# EAGLE board ACU rev2 CCU rev7 (EAGLE 9.6.2), part 1 of 2
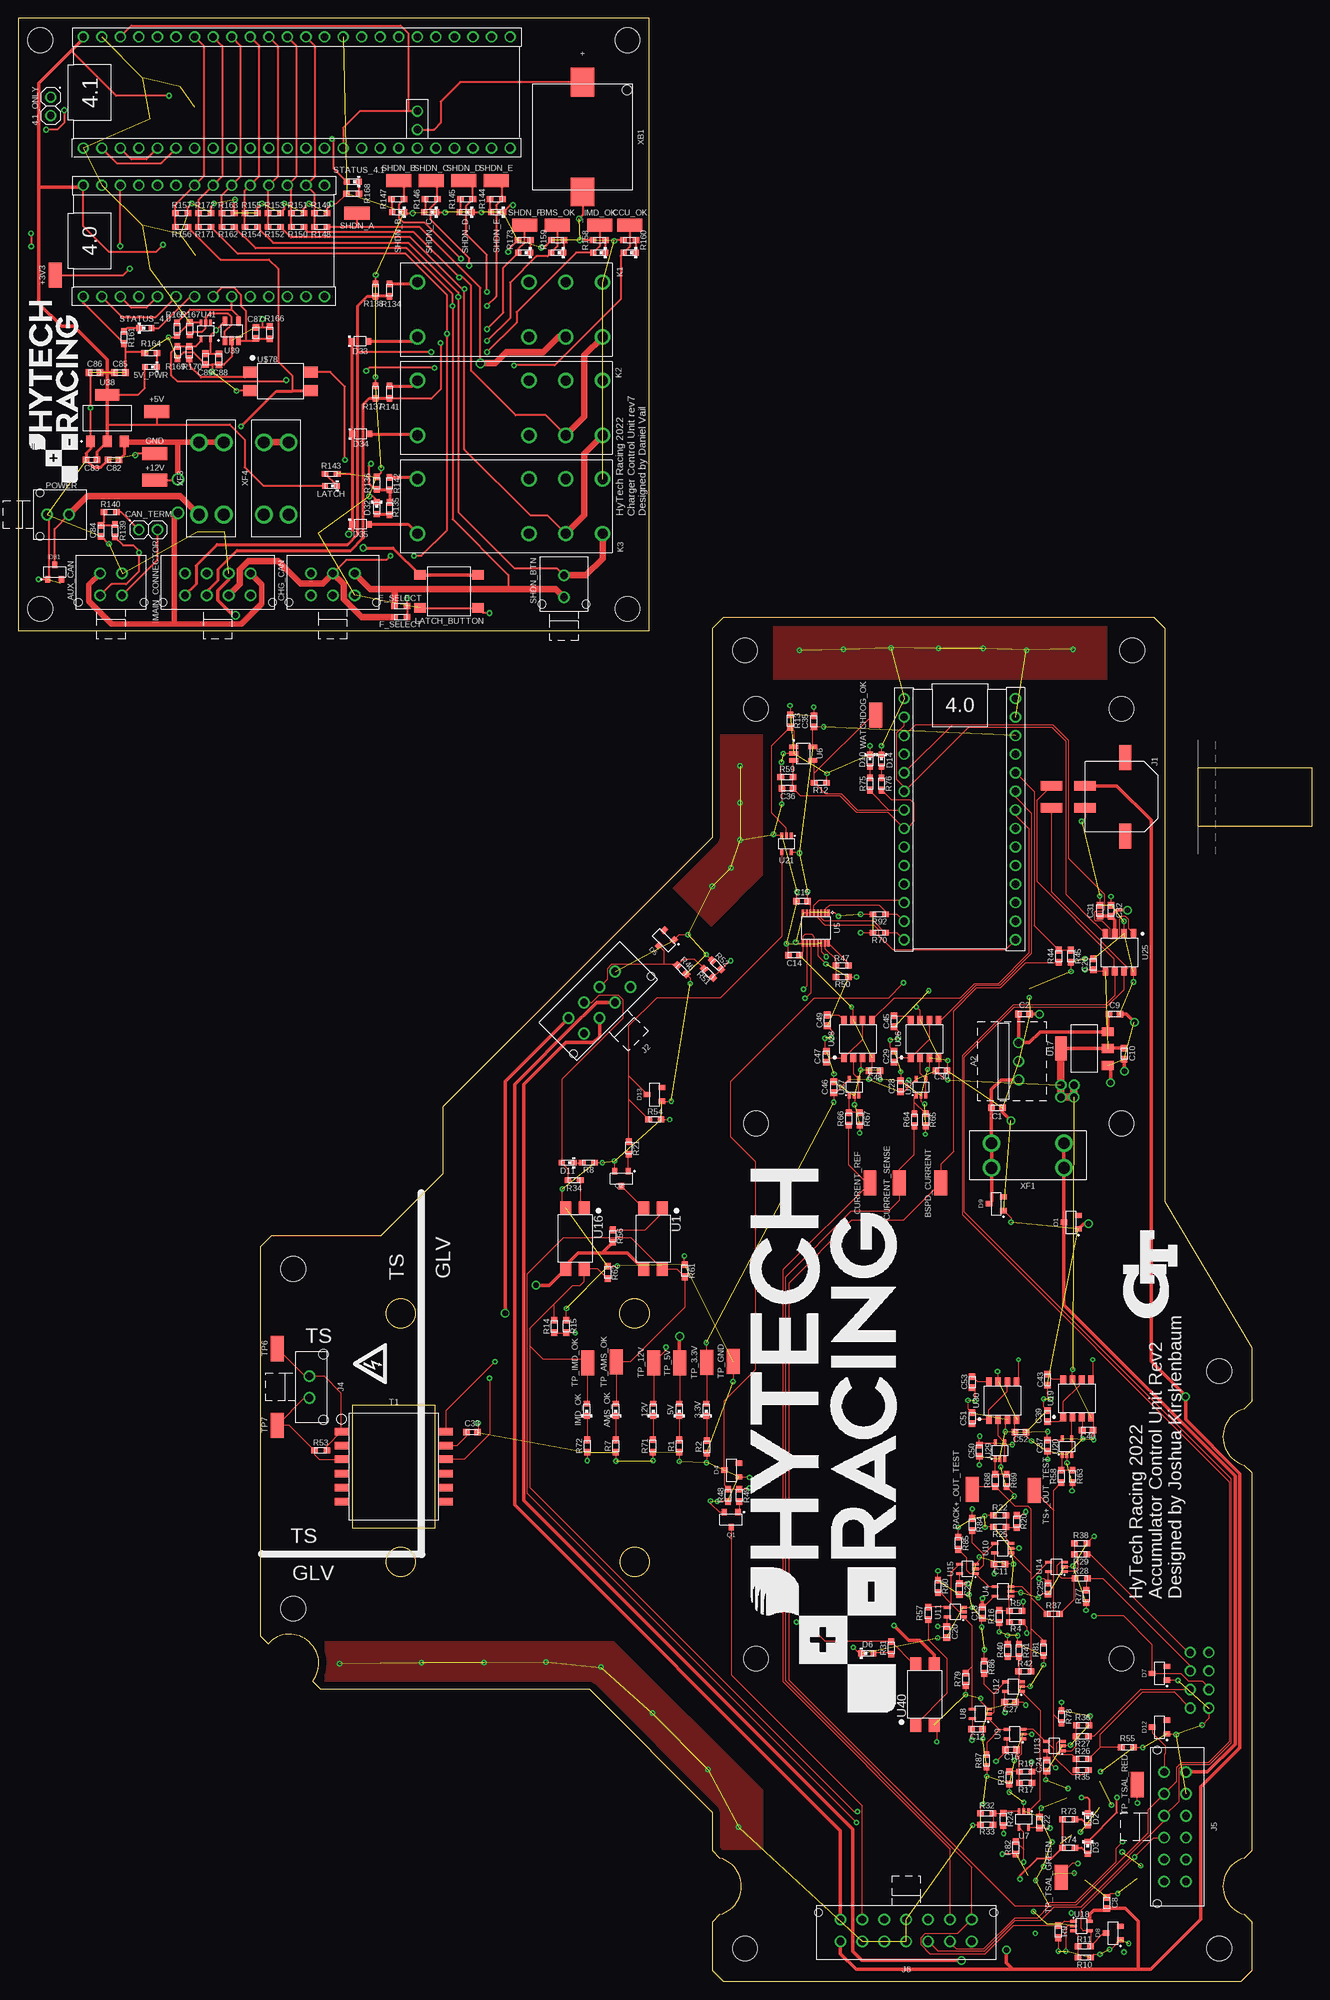
[diagram p0: board, top side]
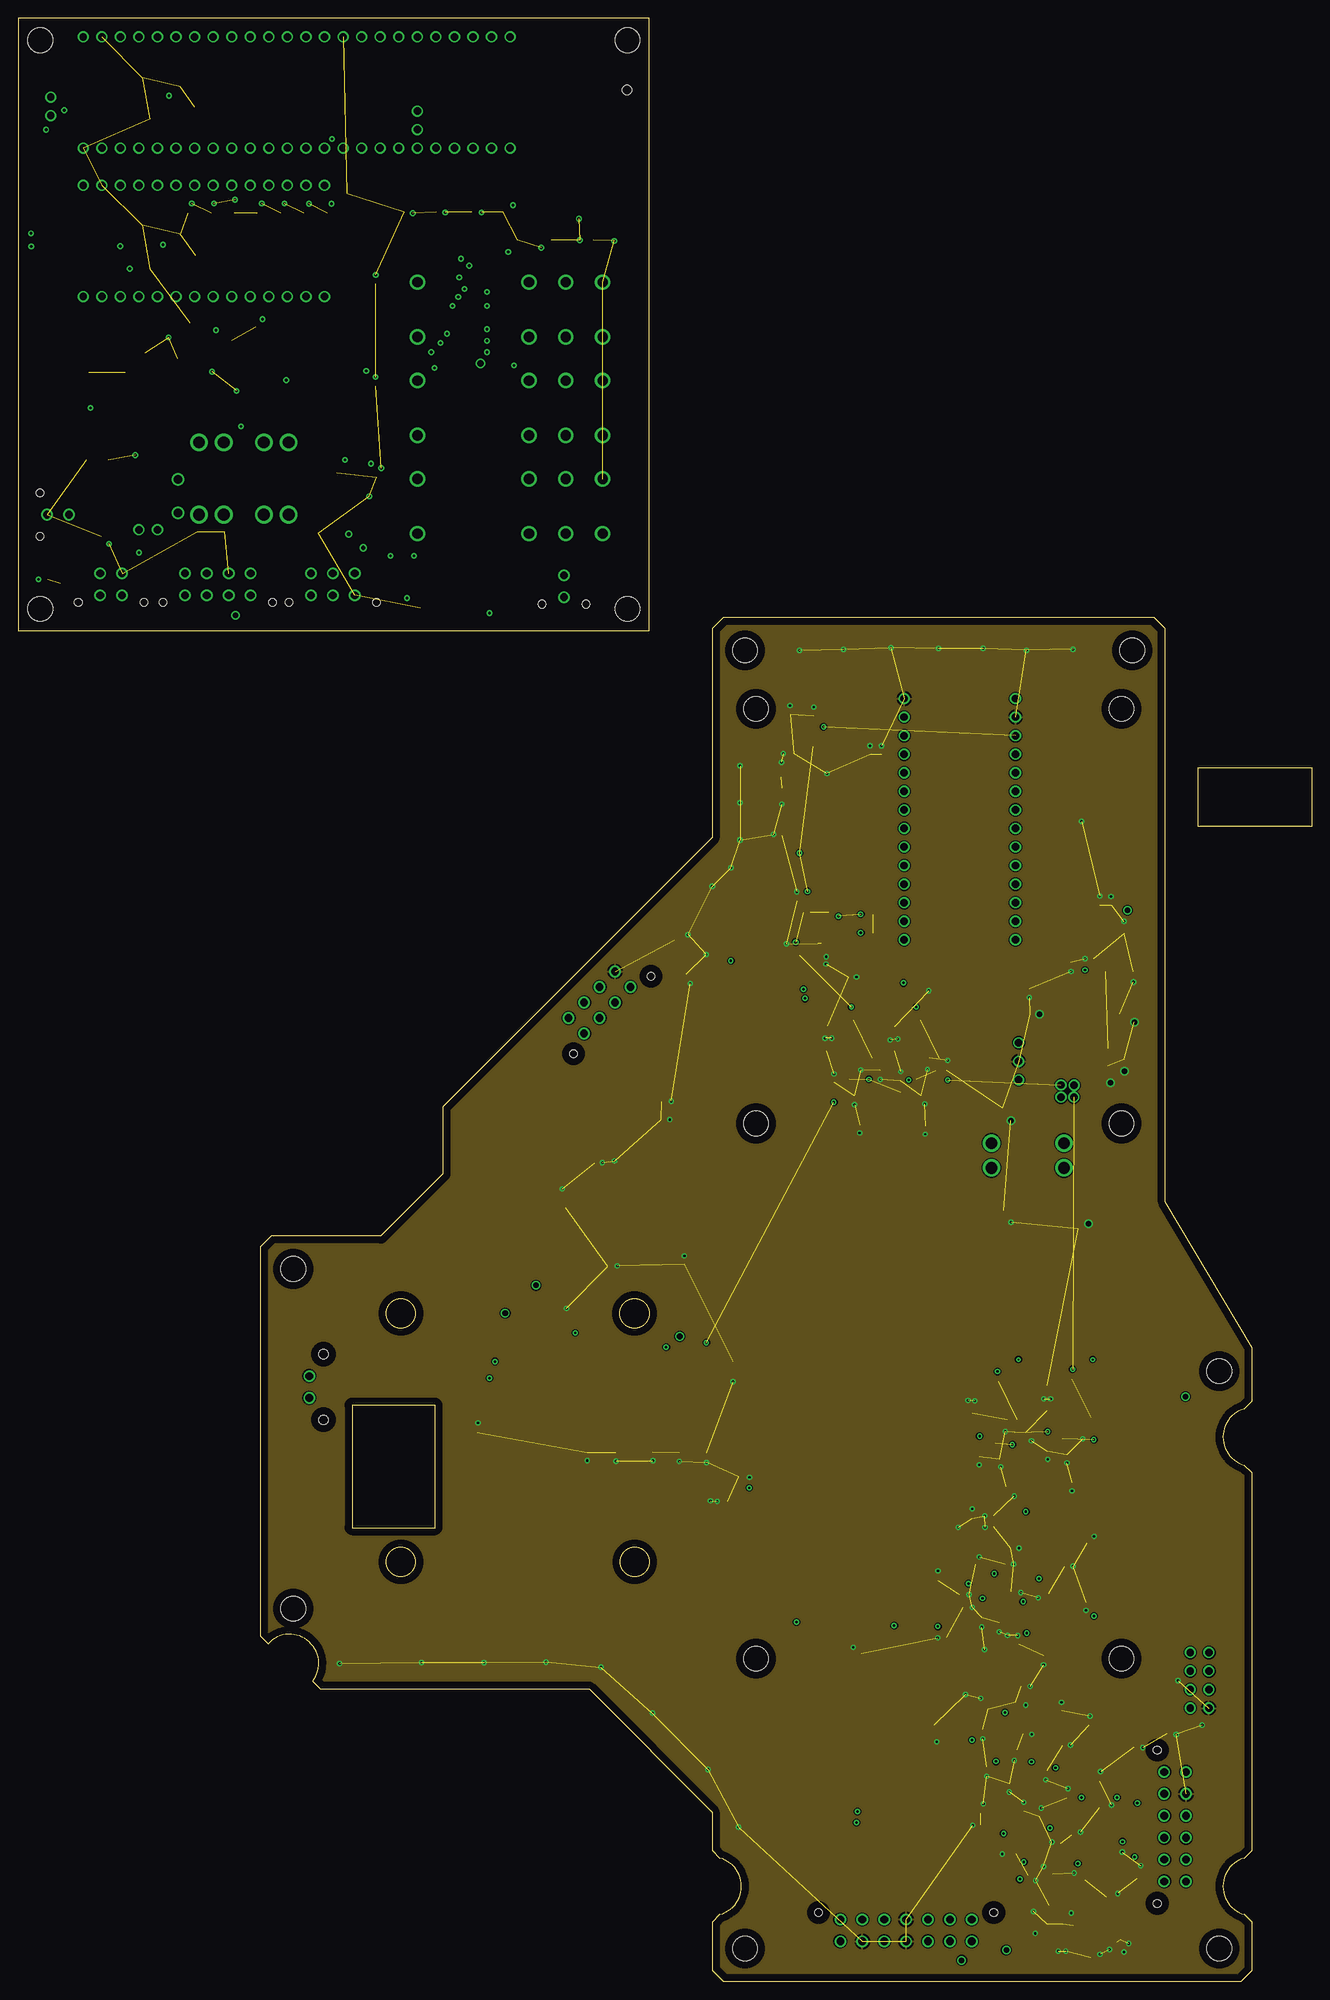
[diagram p1: board, inner layer Route2]
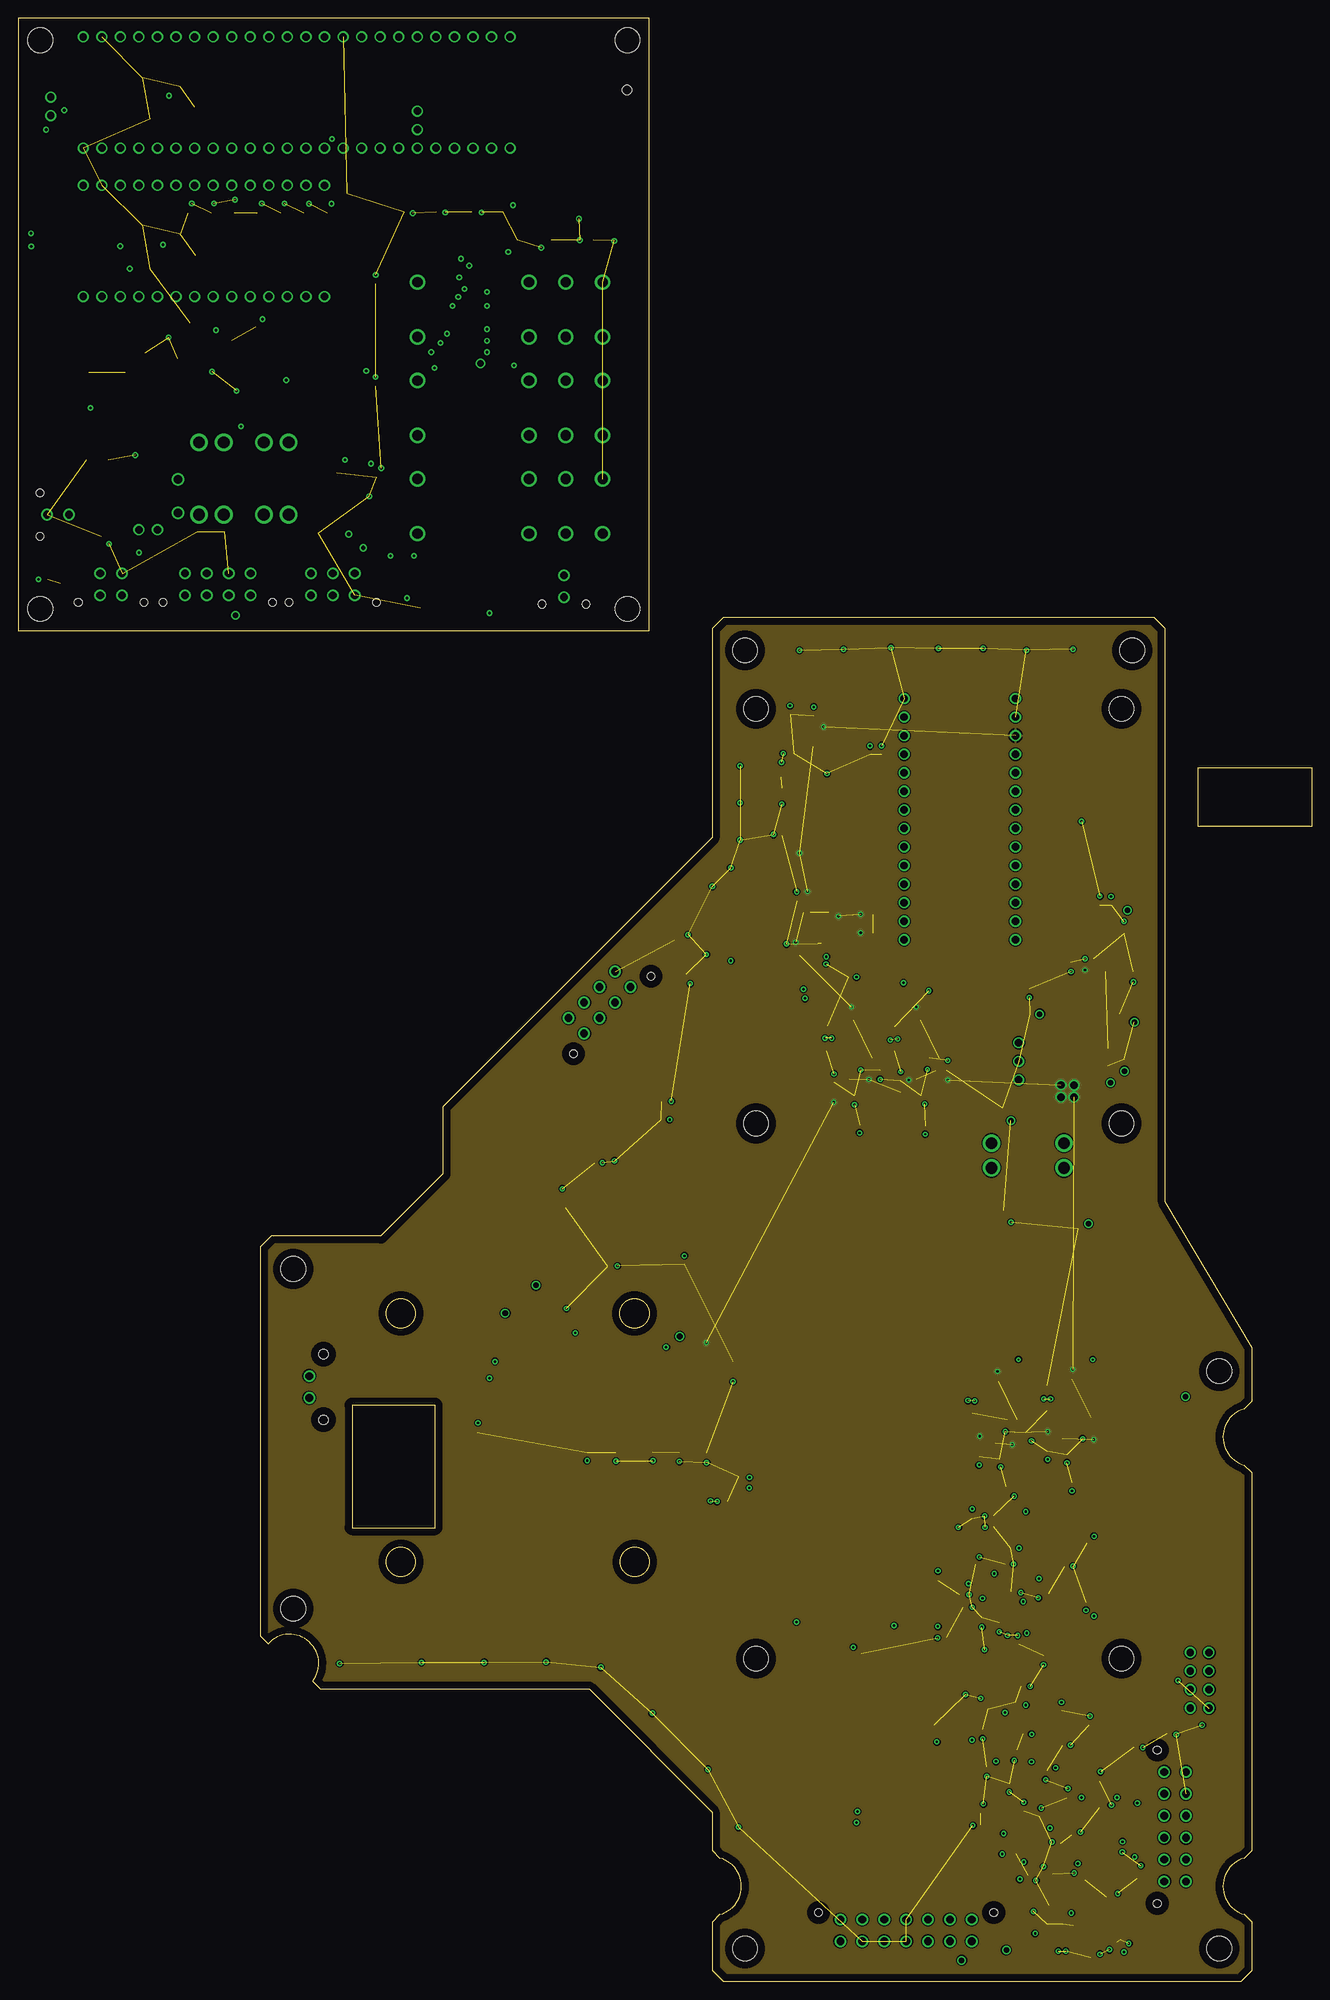
[diagram p2: board, inner layer Route15]
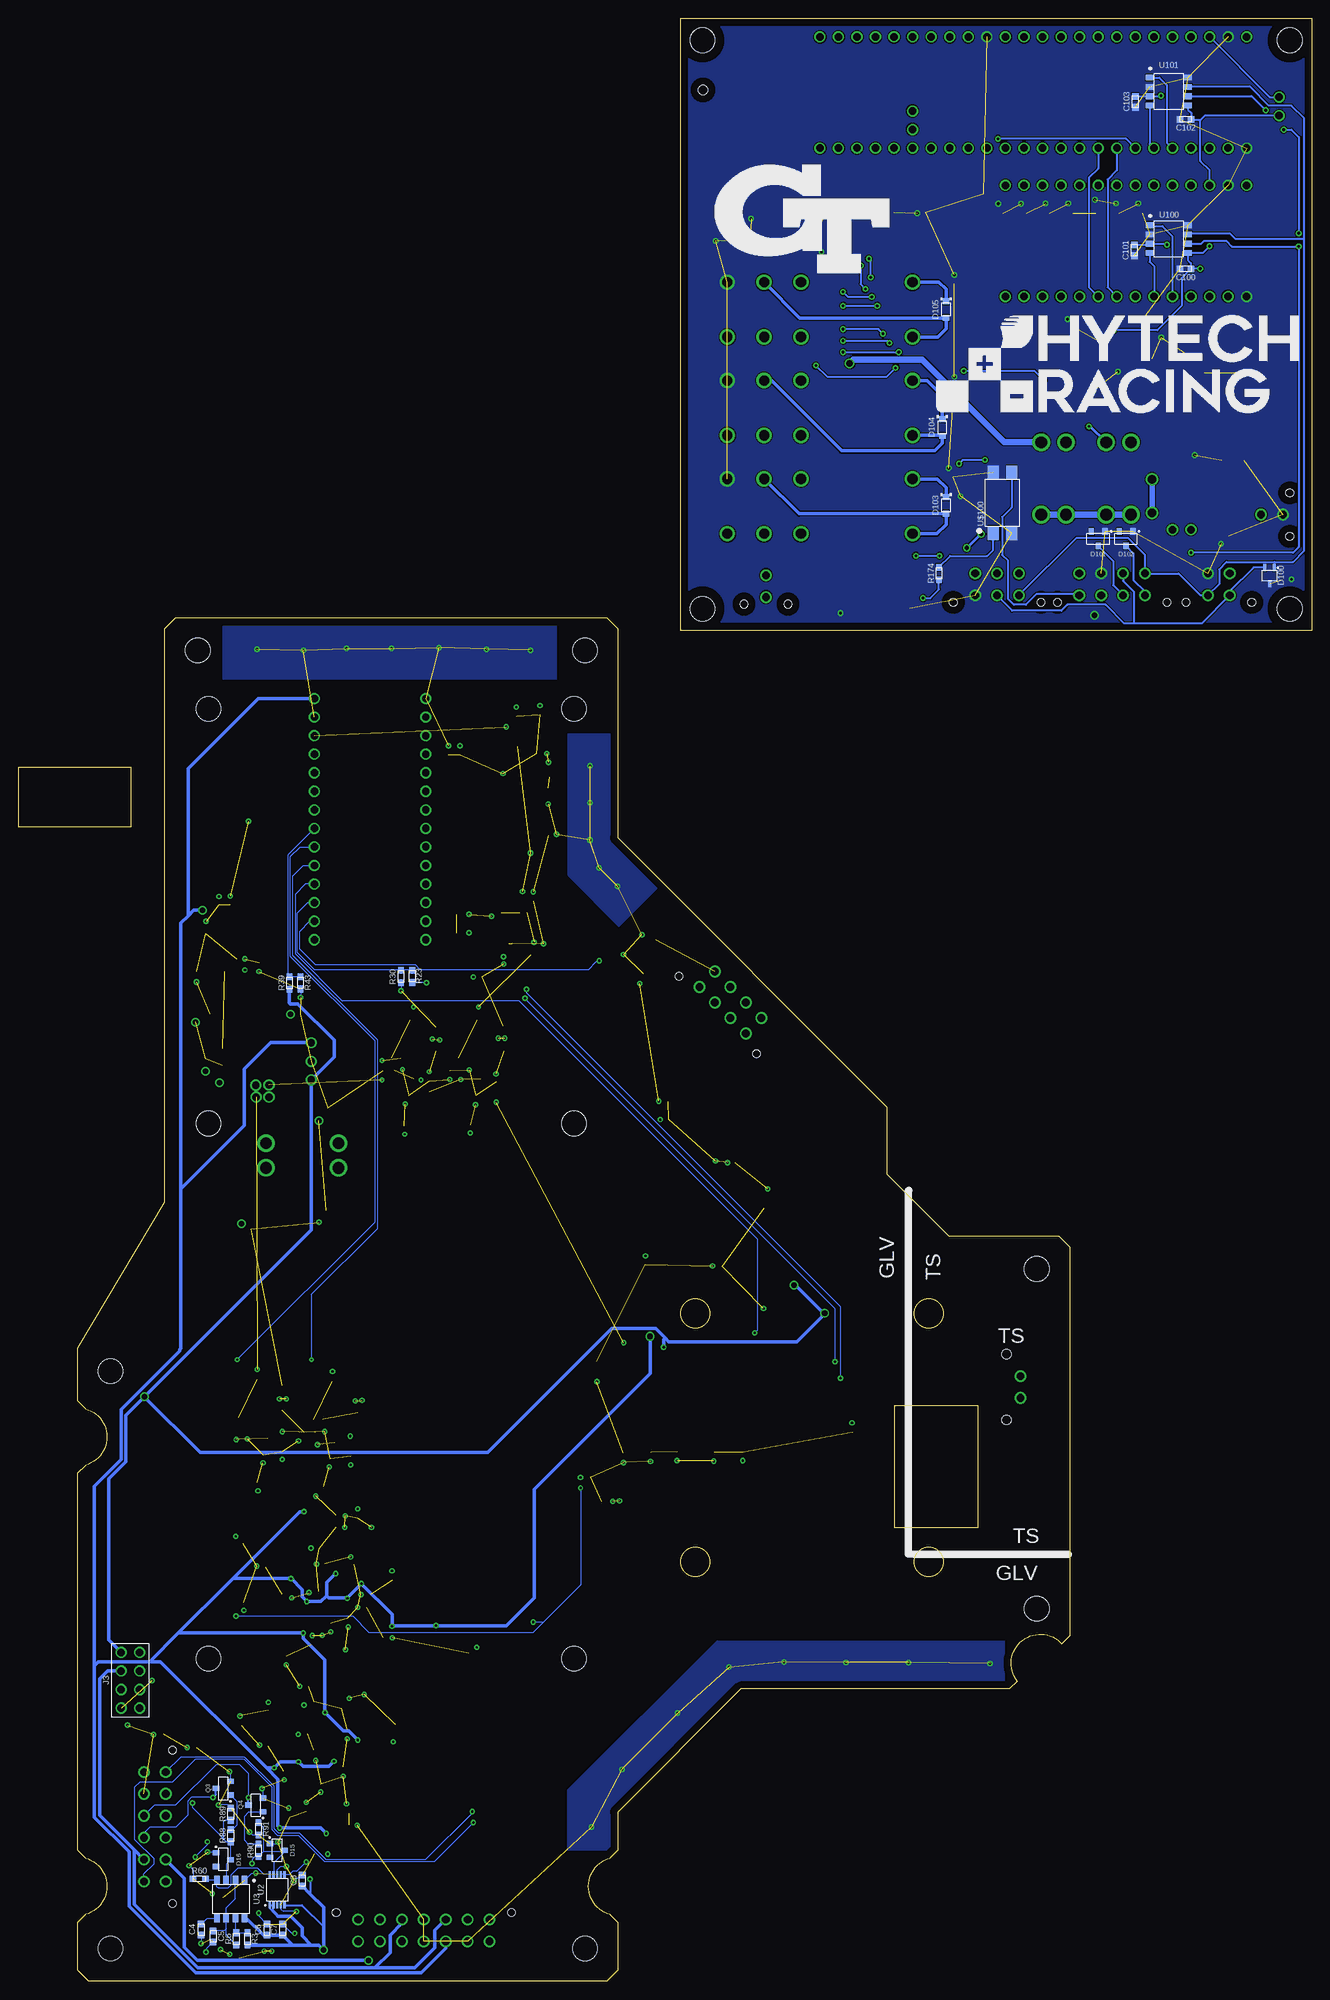
[diagram p3: board, bottom side, seen from below]

Size 168.86 x 268.7 mm. Coordinates in mm from the lower left corner, seen from the top.
Outline: 0,184.88 86.36,184.88 86.36,268.7 0,268.7 0,184.88
Outline: 96.47,0 167.36,0 168.86,1.5 168.86,8.08 167.8,9.14 arc-149 167.8,16.86 168.86,17.92 168.86,69.58 167.8,70.64 arc-149 167.8,78.36 168.86,79.42 168.86,86.67 156.97,106.67 156.97,185.17 155.47,186.67 96.47,186.67 94.97,185.17 94.97,156.52 58.12,119.67 58.12,110.48 49.64,102 34.62,102 33.12,100.5 33.12,47.27 34.18,46.21 arc-175 40.29,41.06 41.35,40 78.12,40 94.97,23.15 94.97,17.92 96.03,16.86 arc-149 96.03,9.14 94.97,8.08 94.97,1.5 96.47,0
Outline: circle at 52.37,91.42 radius 2
Outline: circle at 84.35,57.4 radius 2
Outline: circle at 84.33,91.42 radius 2
Outline: circle at 52.37,57.4 radius 2
Copper layers (1*16): Top 0.035mm / dielectric 1.5mm / Bottom 0.035mm
Design rules "default": minimum track width 6mil, minimum drill 0.35mm, track to track 6mil, track to pad 6mil, pad to pad 6mil, via to via 6mil, smd to smd 6mil, copper to edge 40mil, drill to drill 6mil, minimum pad ring 10mil, minimum via ring 8mil, stop-mask expansion 4mil, vias tented up to drill 0mil, thermal gap 10mil

## Footprints (pad centres in the part's own frame; a part is rotated, then mirrored left to right if it is on the bottom)
0603-LED = smd 0.8 x 0.8: 1 -0.825,0; 2 0.825,0
1X02 = drill 1.016: 1 -1.27,0; 2 1.27,0
TEENSY_SHORT = drill 1.016: 3.3V 0,5.08; AGND/GND 0,2.54; D0 15.24,2.54; D1 15.24,5.08; D2 15.24,7.62; D3 15.24,10.16; D4 15.24,12.7; D5 15.24,15.24; D6 15.24,17.78; D7 15.24,20.32; D8 15.24,22.86; D9 15.24,25.4; D10 15.24,27.94; D11 15.24,30.48; D12 15.24,33.02; D13 0,33.02; D14 0,30.48; D15 0,27.94; D16 0,25.4; D17 0,22.86; D18 0,20.32; D19 0,17.78; D20 0,15.24; D21 0,12.7; D22 0,10.16; D23 0,7.62; GND 15.24,0; VIN 0,0
OKI-78SR = drill 0.991: 1 -2.54,0; 2 0,0; 3 2.54,0
TEENSY_LONG_EXT = drill 1.016: 3V3 0,5.08; 3V3@2 15.24,35.56; 3V3@3 10.16,45.72; AGND/GND 0,2.54; D0 15.24,2.54; D1 15.24,5.08; D2 15.24,7.62; D3 15.24,10.16; D4 15.24,12.7; D5 15.24,15.24; D6 15.24,17.78; D7 15.24,20.32; D8 15.24,22.86; D9 15.24,25.4; D10 15.24,27.94; D11 15.24,30.48; D12 15.24,33.02; D13 0,33.02; D14 0,30.48; D15 0,27.94; D16 0,25.4; D17 0,22.86; D18 0,20.32; D19 0,17.78; D20 0,15.24; D21 0,12.7; D22 0,10.16; D23 0,7.62; D24 15.24,38.1; D25 15.24,40.64; D26 15.24,43.18; D27 15.24,45.72; D28 15.24,48.26; D29 15.24,50.8; D30 15.24,53.34; D31 15.24,55.88; D32 15.24,58.42; D33 0,58.42; D34 0,55.88; D35 0,53.34; D36 0,50.8; D37 0,48.26; D38 0,45.72; D39 0,43.18; D40 0,40.64; D41 0,38.1; GND 15.24,0; GND@2 0,35.56; VBAT 12.7,45.72; VIN 0,0
MOLEX_MICROFIT_PTH_VERTICAL_04_DUAL = drill 1.067: 1 1.499,-2.997; 2 -1.499,-2.997; 3 1.499,0; 4 -1.499,0 | hole 1.067: 4.496,0.94; -4.496,0.94
MICRO_MINIATURE = smd 3.429 x 1.778: 1 0,0
0603-CAP = smd 0.9 x 0.9: 1 -0.75,0; 2 0.75,0
MOLEX_MICROFIT_PTH_VERTICAL_06_DUAL = drill 1.067: 1 2.997,-2.997; 2 0,-2.997; 3 -2.997,-2.997; 4 2.997,0; 5 0,0; 6 -2.997,0 | hole 1.067: 5.994,0.94; -5.994,0.94
SOT-23 = smd 0.711 x 0.889: 1 -0.94,-1.003; 2 0.94,-1.003; 3 0,1.003
SOD-323 = smd 0.8 x 0.9: A -1.15,0; C 1.15,0
SC-70-3 = smd 0.95 x 0.4: 1 -1.1,0.65; 2 -1.1,-0.65; 3 1.1,0
0603-RES = smd 0.9 x 0.8: 1 -0.85,0; 2 0.85,0
MOLEX_MICROFIT_SMD_RIGHTANGLE_04_DUAL = smd 1.27 x 2.921: 1 1.5,5.474; 2 -1.5,5.474; 3 1.5,10.097; 4 -1.5,10.097 | smd 3.429 x 1.651: PAD1 5.386,0; PAD2 -5.386,0
MOLEX_MICROFIT_PTH_VERTICAL_08_DUAL = drill 1.067: 1 4.496,-2.997; 2 1.499,-2.997; 3 -1.499,-2.997; 4 -4.496,-2.997; 5 4.496,0; 6 1.499,0; 7 -1.499,0; 8 -4.496,0 | hole 1.067: 7.493,0.94; -7.493,0.94
FLEX_STACK_PTH_08_DUAL = drill 1.016: 1 -3.81,1.27; 2 -1.27,1.27; 3 1.27,1.27; 4 3.81,1.27; 5 -3.81,-1.27; 6 -1.27,-1.27; 7 1.27,-1.27; 8 3.81,-1.27
MOLEX_MICROFIT_PTH_VERTICAL_02_SINGLE = drill 1.067: 1 1.499,0; 2 -1.499,0 | hole 1.321: 4.496,-1.956; -4.496,-1.956
MOLEX_MICROFIT_PTH_VERTICAL_12_DUAL = drill 1.067: 1 7.493,-2.997; 2 4.496,-2.997; 3 1.499,-2.997; 4 -1.499,-2.997; 5 -4.496,-2.997; 6 -7.493,-2.997; 7 7.493,0; 8 4.496,0; 9 1.499,0; 10 -1.499,0; 11 -4.496,0; 12 -7.493,0 | hole 1.067: 10.49,0.94; -10.49,0.94
MOLEX_MICROFIT_PTH_VERTICAL_14_DUAL = drill 1.067: 1 8.992,-2.997; 2 5.994,-2.997; 3 2.997,-2.997; 4 0,-2.997; 5 -2.997,-2.997; 6 -5.994,-2.997; 7 -8.992,-2.997; 8 8.992,0; 9 5.994,0; 10 2.997,0; 11 0,0; 12 -2.997,0; 13 -5.994,0; 14 -8.992,0 | hole 1.067: 11.989,0.94; -11.989,0.94
RT*2* = drill 1.4: 11 0,3.75; 12 -5.04,3.75; 14 5.04,3.75; 21 0,-3.75; 22 -5.04,-3.75; 24 5.04,-3.75; A1 -20.3,3.75; A2 -20.3,-3.75
B3S-100X = smd 1.55 x 1.3: 1 3.975,-2.25; 2 -3.975,-2.25; 3 3.975,2.25; 4 -3.975,2.25
MOLEX_MICROFIT_PTH_VERTICAL_02_DUAL = drill 1.067: 1 0,-2.997; 2 0,0 | hole 1.067: 2.997,0.94; -2.997,0.94
HM2112ZNLT_AIRGAP = smd 1.02 x 1.89: 1 -4.78,-7.145; 2 -2.89,-7.145; 3 -1,-7.145; 4 1,-7.145; 5 2.875,-7.145; 6 4.78,-7.145; 7 4.78,7.145; 8 2.89,7.145; 9 1,7.145; 10 -1,7.145; 11 -2.89,7.145; 12 -4.78,7.145
5015 = smd 3.429 x 1.778: 1 0,0
DIP-4 = smd 1.5 x 1.9: 1 -1.27,-4.15; 2 1.27,-4.15; 3 -1.27,4.15; 4 1.27,4.15
MSOP-10 = smd 0.305 x 0.889: 1 -1,-2.106; 2 -0.5,-2.106; 3 0,-2.106; 4 0.5,-2.106; 5 1,-2.106; 6 1,2.106; 7 0.5,2.106; 8 0,2.106; 9 -0.5,2.106; 10 -1,2.106
SOIC-08(NARROW,0.15") = smd 0.762 x 1.143: 1 -1.905,-2.603; 2 -0.635,-2.603; 3 0.635,-2.603; 4 1.905,-2.603; 5 1.905,2.603; 6 0.635,2.603; 7 -0.635,2.603; 8 -1.905,2.603
SC-70-5 = smd 0.4 x 0.9: 1 -0.65,-1.1; 2 0,-1.1; 3 0.65,-1.1; 4 0.65,1.1; 5 -0.65,1.1
MSOP-16 = smd 0.305 x 0.889: 1 -1.75,-2.106; 2 -1.25,-2.106; 3 -0.75,-2.106; 4 -0.25,-2.106; 5 0.25,-2.106; 6 0.75,-2.106; 7 1.25,-2.106; 8 1.75,-2.106; 9 1.75,2.106; 10 1.25,2.106; 11 0.75,2.106; 12 0.25,2.106; 13 -0.25,2.106; 14 -0.75,2.106; 15 -1.25,2.106; 16 -1.75,2.106
SOT-23-5 = smd 0.62 x 1.22: 1 -0.95,-1.31; 2 0,-1.31; 3 0.95,-1.31; 4 0.95,1.31; 5 -0.95,1.31
SOT223 = smd 1.2 x 1.6: 1 -2.3,-3.2; 2 0,-3.2; 3 2.3,-3.2 | smd 3.3 x 1.6: 4 0,3.2
SOT-223 = smd 1.2 x 1.6: 1 -2.3,-3.2; 2 0,-3.2; 3 2.3,-3.2 | smd 3.3 x 1.6: 4 0,3.2
MOUNTING_M3 = hole 3.4: 0,0
498 = smd 3.962 x 3.175: 1 -7.518,0; 2 7.518,0 | hole 1.346: -6.426,6.096
3568 = drill 1.6: 1 -4.953,1.702; 2 -4.953,-1.702; 3 4.953,-1.702; 4 4.953,1.702

## Placement (x,y rotation side)
3.3V  LED_0603_GREEN  [0603-LED]  94.17,78.23 90 top
4.1_ONLY  JUMPER__1X02  [1X02]  4.45,256.63 270 top
5V  LED_0603_BLUE  [0603-LED]  90.45,78.23 90 top
5V_PWR  LED_0603_BLUE  [0603-LED]  18.16,220.97 180 top
12V  LED_0603_RED  [0603-LED]  86.9,78.23 90 top
A1  TEENSY_4.0  [TEENSY_SHORT]  136.48,175.58 180 top
A2  VOLTAGE_REGULATOR_MODULE_OKI-78SR_5V  [OKI-78SR]  136.9,125.93 90 top
A3  TEENSY_4.0  [TEENSY_SHORT]  8.89,245.84 270 top
A4  TEENSY_4.1  [TEENSY_LONG_EXT]  8.89,266.16 270 top
AMS_OK  LED_0603_GREEN  [0603-LED]  81.78,78.23 90 top
AUX_CAN  CONNECTOR-CAN_MF_T_V_  [MOLEX_MICROFIT_PTH_VERTICAL_04_DUAL]  12.7,189.71 180 top
BMS_OK  LED_0603_GREEN  [0603-LED]  73.76,236.62 180 top
BSPD_CURRENT  TEST_POINT  [MICRO_MINIATURE]  126.22,109.28 90 top
C1  CAPACITOR_0603_25V_10UF  [0603-CAP]  133.93,119.56 0 top
C2  CAPACITOR_0603_25V_10UF  [0603-CAP]  137.66,132.4 0 top
C3  CAPACITOR_0603_25V_1UF  [0603-CAP]  138.14,13.79 90 bottom
C4  CAPACITOR_0603_10V_10NF  [0603-CAP]  151.98,7.06 270 bottom
C5  CAPACITOR_0603_10V_4.7UF  [0603-CAP]  150.34,6.15 270 bottom
C6  CAPACITOR_0603_25V_1UF  [0603-CAP]  142.97,7.06 90 bottom
C7  CAPACITOR_0603_25V_0.1UF  [0603-CAP]  140.81,7.06 90 bottom
C8  CAPACITOR_0603_25V_0.1UF  [0603-CAP]  148.95,10.72 90 top
C9  CAPACITOR_0603_10V_1UF  [0603-CAP]  150.01,132.38 0 top
C10  CAPACITOR_0603_10V_4.7UF  [0603-CAP]  151.33,126.97 270 top
C11  CAPACITOR_0603_10V_0.1UF  [0603-CAP]  134.3,57.11 0 top
C12  CAPACITOR_0603_10V_0.1UF  [0603-CAP]  131.23,34.5 0 top
C13  CAPACITOR_0603_10V_0.1UF  [0603-CAP]  131.94,50.48 270 top
C14  CAPACITOR_0603_10V_0.1UF  [0603-CAP]  106.15,140.46 180 top
C15  CAPACITOR_0603_10V_10NF  [0603-CAP]  107.27,147.84 0 top
C16  CAPACITOR_0603_10V_0.1UF  [0603-CAP]  135.87,31.68 0 top
C20  CAPACITOR_0603_10V_0.1UF  [0603-CAP]  127.06,47.81 270 top
C22  CAPACITOR_0603_10V_0.1UF  [0603-CAP]  139.76,21.75 90 top
C23  CAPACITOR_0603_10V_0.1UF  [0603-CAP]  128.79,53.7 270 top
C24  CAPACITOR_0603_10V_0.1UF  [0603-CAP]  140.75,29.52 270 top
C25  CAPACITOR_0603_10V_0.1UF  [0603-CAP]  140.93,53.75 270 top
C26  CAPACITOR_0603_10V_0.1UF  [0603-CAP]  147.13,139.19 270 top
C27  CAPACITOR_0603_10V_0.1UF  [0603-CAP]  135.75,38.23 0 top
C28  CAPACITOR_0603_25V_0.1UF  [0603-CAP]  120.74,122.5 90 top
C29  CAPACITOR_0603_10V_0.1UF  [0603-CAP]  119.85,126.56 90 top
C30  CAPACITOR_0603_10V_0.1UF  [0603-CAP]  126.33,124.66 0 top
C31  CAPACITOR_0603_10V_0.1UF  [0603-CAP]  148.02,146.55 270 top
C32  CAPACITOR_0603_10V_1UF  [0603-CAP]  149.55,146.55 270 top
C33  CAPACITOR_0603_10V_10NF  [0603-CAP]  62.09,75.16 0 top
C35  CAPACITOR_0603_10V_0.1UF  [0603-CAP]  108.88,172.46 90 top
C36  CAPACITOR_0603_10V_0.1UF  [0603-CAP]  105.26,163.31 180 top
C37  CAPACITOR_0603_25V_0.1UF  [0603-CAP]  140.84,73.3 270 top
C39  CAPACITOR_0603_10V_0.1UF  [0603-CAP]  140.84,77.37 90 top
C40  CAPACITOR_0603_10V_0.1UF  [0603-CAP]  146.35,75.46 180 top
C43  CAPACITOR_0603_10V_680PF  [0603-CAP]  140.84,82.32 270 top
C45  CAPACITOR_0603_10V_680PF  [0603-CAP]  119.85,131.39 270 top
C46  CAPACITOR_0603_25V_0.1UF  [0603-CAP]  111.6,122.37 90 top
C47  CAPACITOR_0603_10V_0.1UF  [0603-CAP]  110.58,126.56 90 top
C48  CAPACITOR_0603_10V_0.1UF  [0603-CAP]  117.19,124.66 0 top
C49  CAPACITOR_0603_10V_680PF  [0603-CAP]  110.71,131.52 270 top
C50  CAPACITOR_0603_25V_0.1UF  [0603-CAP]  131.52,72.62 270 top
C51  CAPACITOR_0603_10V_0.1UF  [0603-CAP]  130.53,77.06 90 top
C52  CAPACITOR_0603_10V_0.1UF  [0603-CAP]  137.13,75.16 0 top
C53  CAPACITOR_0603_10V_680PF  [0603-CAP]  130.53,82.02 270 top
C82  CAPACITOR_0603_25V_10UF  [0603-CAP]  13.06,208.25 180 top
C83  CAPACITOR_0603_25V_10UF  [0603-CAP]  10.03,208.25 180 top
C84  CAPACITOR_0603_10V_4.7NF  [0603-CAP]  11.33,198.55 270 top
C85  CAPACITOR_0603_10V_1UF  [0603-CAP]  13.92,220.19 0 top
C86  CAPACITOR_0603_10V_0.1UF  [0603-CAP]  10.41,220.19 0 top
C87  CAPACITOR_0603_10V_0.1UF  [0603-CAP]  32.51,225.65 270 top
C88  CAPACITOR_0603_10V_0.1UF  [0603-CAP]  27.46,222.01 90 top
C89  CAPACITOR_0603_10V_0.1UF  [0603-CAP]  25.63,222.04 90 top
C100  CAPACITOR_0603_10V_0.1UF  [0603-CAP]  17.27,234.41 0 bottom
C101  CAPACITOR_0603_10V_0.1UF  [0603-CAP]  24.26,236.95 90 bottom
C102  CAPACITOR_0603_10V_0.1UF  [0603-CAP]  17.27,254.86 0 bottom
C103  CAPACITOR_0603_10V_0.1UF  [0603-CAP]  24.13,257.27 90 bottom
CAN_TERM  JUMPER__1X02  [1X02]  17.78,198.7 0 top
CCU_OK  LED_0603_GREEN  [0603-LED]  83.69,236.62 180 top
CHG_CAN  CONNECTOR-6_MF_T_V_  [MOLEX_MICROFIT_PTH_VERTICAL_06_DUAL]  43.05,189.71 180 top
CURRENT_REF  TEST_POINT  [MICRO_MINIATURE]  116.56,109.28 90 top
CURRENT_SENSE  TEST_POINT  [MICRO_MINIATURE]  120.59,109.28 90 top
D1  TVS_15V  [SOT-23]  144.08,103.91 90 top
D2  LED_0603_GREEN  [0603-LED]  146.35,22.17 270 top
D3  LED_0603_RED  [0603-LED]  146.35,18.29 270 top
D4  TVS_8V  [SOT-23]  97.63,69.97 90 top
D5  TVS_15V  [SOT-23]  88.37,142.49 135 top
D6  LED_0603_RED  [0603-LED]  116.21,44.9 0 top
D7  TVS_15V  [SOT-23]  156.18,42.16 90 top
D8  TVS_15V  [SOT-23]  149.83,6.6 90 top
D9  TVS_15V  [SOT-23]  133.83,106.43 90 top
D10  LED_0603_GREEN  [0603-LED]  116.56,167.11 270 top
D11  LED_0603_YELLOW  [0603-LED]  75.2,112.04 180 top
D12  TVS_15V  [SOT-23]  156.18,34.8 90 top
D13  TVS_8V  [SOT-23]  87.08,121.39 90 top
D14  LED_0603_RED  [0603-LED]  118.13,167.11 270 top
D15  TVS_15V  [SOT-23]  141.58,17.91 270 bottom
D16  TVS_15V  [SOT-23]  148.94,16.64 270 bottom
D31  TVS_15V  [SOT-23]  4.98,192.88 0 top
D32  LED_0603_RED  [0603-LED]  49.05,201.64 270 top
D33  SCHOTTKY_SOD323_30V  [SOD-323]  46.79,224.48 180 top
D34  SCHOTTKY_SOD323_30V  [SOD-323]  46.86,211.8 180 top
D35  SCHOTTKY_SOD323_30V  [SOD-323]  46.84,199.43 180 top
D100  TVS_BIDIRECTIONAL_DUAL  [SC-70-3]  5.77,192.42 270 bottom
D101  TVS_15V  [SOT-23]  29.21,197.45 180 bottom
D102  TVS_15V  [SOT-23]  25.4,197.45 180 bottom
D103  SCHOTTKY_SOD323_30V  [SOD-323]  50.04,202.03 90 bottom
D104  SCHOTTKY_SOD323_30V  [SOD-323]  50.55,212.69 90 bottom
D105  SCHOTTKY_SOD323_30V  [SOD-323]  50.04,228.82 90 bottom
E_SELECT  JUMPER_0603_  [0603-RES]  52.35,188.26 0 top
F_SELECT  JUMPER_0603_  [0603-RES]  52.35,186.71 0 top
IMD_OK  LED_0603_ORANGE  [0603-LED]  77.8,78.23 90 top
J1  CONNECTOR-CAN_μF_S_RA_  [MOLEX_MICROFIT_SMD_RIGHTANGLE_04_DUAL]  151.48,162.12 90 top
J2  CONNECTOR-8_MF_T_V_  [MOLEX_MICROFIT_PTH_VERTICAL_08_DUAL]  80.61,132.91 225 top
J3  CONNECTOR-8_S_S  [FLEX_STACK_PTH_08_DUAL]  161.66,41.2 270 bottom
J4  CONNECTOR-2_MF_T_V_  [MOLEX_MICROFIT_PTH_VERTICAL_02_SINGLE]  39.84,81.34 90 top
J5  CONNECTOR-12_MF_T_V_  [MOLEX_MICROFIT_PTH_VERTICAL_12_DUAL]  156.81,21.15 90 top
J6  CONNECTOR-14_MF_T_V_  [MOLEX_MICROFIT_PTH_VERTICAL_14_DUAL]  121.5,8.45 0 top
K1  RELAY_DPDT  [RT*2*]  74.93,228.82 0 top
K2  RELAY_DPDT  [RT*2*]  74.93,215.36 0 top
K3  RELAY_DPDT  [RT*2*]  74.93,201.9 0 top
LATCH  LED_0603_WHITE  [0603-LED]  42.8,204.69 180 top
LATCH_BUTTON  BUTTON  [B3S-100X]  58.95,190.24 180 top
MAIN_CONNECTOR  CONNECTOR-8_MF_T_V_  [MOLEX_MICROFIT_PTH_VERTICAL_08_DUAL]  27.3,189.71 180 top
OKHS  LED_0603_YELLOW  [0603-LED]  79.53,236.62 180 top
PACK+_OUT_TEST  TEST_POINT  [MICRO_MINIATURE]  130.53,67.31 270 top
POWER  CONNECTOR-2_μF_T_V_  [MOLEX_MICROFIT_PTH_VERTICAL_02_DUAL]  3.94,200.76 90 top
Q1  TRANSISTOR_N_MOS__PMV15ENEA  [SOT-23]  97.55,63.19 180 top
Q2  TRANSISTOR_N_MOS__PMV15ENEA  [SOT-23]  82.55,109.86 180 top
Q3  TRANSISTOR_N_MOS__PMV15ENEA  [SOT-23]  148.94,26.42 90 bottom
Q4  TRANSISTOR_N_MOS__PMV15ENEA  [SOT-23]  144.5,24.13 90 bottom
R1  RESISTOR_0603_1K  [0603-RES]  90.45,73.25 90 top
R2  RESISTOR_0603_1K  [0603-RES]  94.21,73.15 90 top
R3  RESISTOR_0603_1K  [0603-RES]  145.63,5.79 270 bottom
R4  RESISTOR_0603_DNP  [0603-RES]  136.48,49.15 0 top
R5  RESISTOR_0603_4.12K  [0603-RES]  136.48,50.68 0 top
R6  RESISTOR_0603_43K  [0603-RES]  147.16,5.79 90 bottom
R7  RESISTOR_0603_1K  [0603-RES]  81.79,73.25 90 top
R8  RESISTOR_0603_1K  [0603-RES]  78.03,112.04 180 top
R9  RESISTOR_0603_10K  [0603-RES]  142.33,6.8 90 top
R10  RESISTOR_0603_1K  [0603-RES]  145.89,3.25 180 top
R11  RESISTOR_0603_1.4K  [0603-RES]  145.89,4.77 0 top
R12  RESISTOR_0603_10K  [0603-RES]  109.78,164.05 180 top
R13  RESISTOR_0603_100K  [0603-RES]  105.62,172.52 270 top
R14  RESISTOR_0603_33K  [0603-RES]  73.35,89.62 270 top
R15  RESISTOR_0603_12K  [0603-RES]  74.98,89.65 90 top
R16  RESISTOR_0603_10.2K  [0603-RES]  134.25,49.94 90 top
R17  RESISTOR_0603_4.12K  [0603-RES]  137.85,27.16 0 top
R18  RESISTOR_0603_DNP  [0603-RES]  137.85,28.71 0 top
R19  RESISTOR_0603_10.2K  [0603-RES]  135.59,27.87 90 top
R20  RESISTOR_0603_11.5K  [0603-RES]  136.64,62.92 90 top
R21  RESISTOR_0603_10  [0603-RES]  83.56,114.05 270 top
R22  RESISTOR_0603_DNP  [0603-RES]  134.32,63.76 0 top
R23  RESISTOR_0603_18.7K  [0603-RES]  123.1,137.56 90 bottom
R24  RESISTOR_0603_84.5K  [0603-RES]  134.81,22.15 270 top
R25  RESISTOR_0603_11.5K  [0603-RES]  134.32,62.19 0 top
R26  RESISTOR_0603_11.5K  [0603-RES]  145.63,30.46 180 top
R27  RESISTOR_0603_11.5K  [0603-RES]  145.63,33.51 180 top
R28  RESISTOR_0603_11.5K  [0603-RES]  145.47,55.15 180 top
R29  RESISTOR_0603_11.5K  [0603-RES]  145.4,58.43 180 top
R30  RESISTOR_0603_33K  [0603-RES]  124.62,137.54 270 bottom
R31  RESISTOR_0603_1K  [0603-RES]  119.47,45.65 90 top
R32  RESISTOR_0603_DNP  [0603-RES]  132.55,22.97 0 top
R33  RESISTOR_0603_11.5K  [0603-RES]  132.55,21.39 0 top
R34  RESISTOR_0603_2K  [0603-RES]  76.06,109.65 0 top
R35  RESISTOR_0603_10.5K  [0603-RES]  145.6,28.91 0 top
R36  RESISTOR_0603_10.5K  [0603-RES]  145.65,35.03 0 top
R37  RESISTOR_0603_10.5K  [0603-RES]  141.66,50.3 180 top
R38  RESISTOR_0603_10.5K  [0603-RES]  145.4,59.95 0 top
R39  RESISTOR_0603_33K  [0603-RES]  139.89,136.65 90 bottom
R40  RESISTOR_0603_DNP  [0603-RES]  135.39,45.29 270 top
R41  RESISTOR_0603_215K  [0603-RES]  136.94,45.29 270 top
R42  RESISTOR_0603_11.3K  [0603-RES]  137.75,42.4 0 top
R43  RESISTOR_0603_12K  [0603-RES]  138.37,136.67 270 bottom
R44  RESISTOR_0603_33K  [0603-RES]  142.38,140.3 90 top
R45  RESISTOR_0603_12K  [0603-RES]  144.03,140.3 270 top
R46  RESISTOR_0603_2.2K  [0603-RES]  90.79,138.48 135 top
R47  RESISTOR_0603_1K  [0603-RES]  112.74,139.02 180 top
R48  RESISTOR_0603_10K  [0603-RES]  97.12,66.52 270 top
R49  RESISTOR_0603_10  [0603-RES]  98.67,66.52 270 top
R50  RESISTOR_0603_1K  [0603-RES]  112.75,137.47 0 top
R51  RESISTOR_0603_33K  [0603-RES]  94.47,138 315 top
R52  RESISTOR_0603_15K  [0603-RES]  95.57,139.12 135 top
R53  RESISTOR_0603_100  [0603-RES]  41.38,72.64 0 top
R54  RESISTOR_0603_10K  [0603-RES]  87.13,117.95 0 top
R55  RESISTOR_0603_10K  [0603-RES]  151.79,32.03 180 top
R56  RESISTOR_0603_2K  [0603-RES]  81.35,101.99 270 top
R57  RESISTOR_0603_470  [0603-RES]  124.55,50.37 270 top
R58  RESISTOR_0603_10K  [0603-RES]  142.75,69.11 90 top
R59  RESISTOR_0603_10K  [0603-RES]  105.2,164.83 0 top
R60  RESISTOR_0603_10K  [0603-RES]  152.24,14.04 0 bottom
R61  RESISTOR_0603_10K  [0603-RES]  91.2,97.26 270 top
R62  RESISTOR_0603_10K  [0603-RES]  80.66,97.01 270 top
R63  RESISTOR_0603_12K  [0603-RES]  144.27,69.11 270 top
R64  RESISTOR_0603_10K  [0603-RES]  122.65,117.93 90 top
R65  RESISTOR_0603_12K  [0603-RES]  124.17,117.93 270 top
R66  RESISTOR_0603_10K  [0603-RES]  113.63,118.05 90 top
R67  RESISTOR_0603_12K  [0603-RES]  115.15,118.05 270 top
R68  RESISTOR_0603_10K  [0603-RES]  133.71,68.55 90 top
R69  RESISTOR_0603_12K  [0603-RES]  135.23,68.55 270 top
R70  RESISTOR_0603_2K  [0603-RES]  117.83,143.51 180 top
R71  RESISTOR_0603_1K  [0603-RES]  86.84,73.28 90 top
R72  RESISTOR_0603_2K  [0603-RES]  77.85,73.25 90 top
R73  RESISTOR_0603_2K  [0603-RES]  143.74,22.17 0 top
R74  RESISTOR_0603_2K  [0603-RES]  143.74,18.29 0 top
R75  RESISTOR_0603_470  [0603-RES]  116.56,163.91 270 top
R76  RESISTOR_0603_470  [0603-RES]  118.13,163.91 270 top
R77  RESISTOR_0603_10K  [0603-RES]  146.18,52.7 90 top
R78  RESISTOR_0603_10K  [0603-RES]  142.77,36.22 270 top
R79  RESISTOR_0603_10K  [0603-RES]  129.64,41.35 90 top
R80  RESISTOR_0603_10K  [0603-RES]  125.86,54.05 270 top
R81  RESISTOR_0603_10K  [0603-RES]  140.31,45.42 90 top
R82  RESISTOR_0603_10K  [0603-RES]  136.52,18.26 90 top
R84  RESISTOR_0603_10K  [0603-RES]  130.56,62.51 270 top
R85  RESISTOR_0603_10K  [0603-RES]  128.65,59.97 270 top
R86  RESISTOR_0603_10K  [0603-RES]  132.21,43 270 top
R87  RESISTOR_0603_10K  [0603-RES]  132.51,30.2 90 top
R88  RESISTOR_0603_10  [0603-RES]  147.93,19.94 90 bottom
R89  RESISTOR_0603_10K  [0603-RES]  147.93,22.89 90 bottom
R90  RESISTOR_0603_10  [0603-RES]  144.12,17.91 90 bottom
R91  RESISTOR_0603_10K  [0603-RES]  144.12,20.85 270 bottom
R92  RESISTOR_0603_2K  [0603-RES]  117.83,146.05 180 top
R134  RESISTOR_0603_22  [0603-RES]  50.8,231.49 270 top
R135  RESISTOR_0603_1K  [0603-RES]  50.8,201.59 270 top
R136  RESISTOR_0603_10K  [0603-RES]  49.05,205.05 270 top
R137  RESISTOR_0603_10K  [0603-RES]  48.89,217.52 270 top
R138  RESISTOR_0603_10K  [0603-RES]  48.89,231.49 270 top
R139  RESISTOR_0603_60.4  [0603-RES]  13.23,198.55 90 top
R140  RESISTOR_0603_60.4  [0603-RES]  12.6,201.09 0 top
R141  RESISTOR_0603_22  [0603-RES]  50.8,217.52 270 top
R142  RESISTOR_0603_22  [0603-RES]  50.8,205.02 270 top
R143  RESISTOR_0603_1K  [0603-RES]  42.8,206.34 0 top
R144  RESISTOR_0603_1K  [0603-RES]  65.41,243.94 180 top
R145  RESISTOR_0603_1K  [0603-RES]  61.34,243.94 180 top
R146  RESISTOR_0603_1K  [0603-RES]  56.51,243.94 180 top
R147  RESISTOR_0603_1K  [0603-RES]  51.94,243.94 180 top
R148  RESISTOR_0603_33K  [0603-RES]  41.4,240.12 180 top
R149  RESISTOR_0603_12K  [0603-RES]  41.4,242.03 0 top
R150  RESISTOR_0603_33K  [0603-RES]  38.23,240.12 180 top
R151  RESISTOR_0603_12K  [0603-RES]  38.23,242.03 0 top
R152  RESISTOR_0603_33K  [0603-RES]  35.05,240.12 180 top
R153  RESISTOR_0603_12K  [0603-RES]  35.05,242.03 0 top
R154  RESISTOR_0603_33K  [0603-RES]  31.88,240.12 180 top
R155  RESISTOR_0603_12K  [0603-RES]  31.88,242.03 0 top
R156  RESISTOR_0603_33K  [0603-RES]  22.35,240.12 180 top
R157  RESISTOR_0603_12K  [0603-RES]  22.35,242.03 0 top
R158  RESISTOR_0603_1K  [0603-RES]  79.53,238.32 180 top
R159  RESISTOR_0603_1K  [0603-RES]  73.81,238.32 180 top
R160  RESISTOR_0603_1K  [0603-RES]  83.67,238.32 180 top
R161  RESISTOR_0603_1K  [0603-RES]  14.48,225.01 270 top
R162  RESISTOR_0603_33K  [0603-RES]  28.7,240.12 180 top
R163  RESISTOR_0603_12K  [0603-RES]  28.7,242.03 0 top
R164  RESISTOR_0603_1K  [0603-RES]  18.16,222.88 180 top
R165  RESISTOR_0603_10K  [0603-RES]  21.72,226.16 270 top
R166  RESISTOR_0603_10K  [0603-RES]  34.42,225.65 270 top
R167  RESISTOR_0603_100K  [0603-RES]  23.47,226.18 90 top
R168  RESISTOR_0603_1K  [0603-RES]  45.77,244.7 180 top
R169  RESISTOR_0603_10K  [0603-RES]  21.79,222.95 90 top
R170  RESISTOR_0603_240  [0603-RES]  23.42,222.95 90 top
R171  RESISTOR_0603_33K  [0603-RES]  25.53,240.12 180 top
R172  RESISTOR_0603_12K  [0603-RES]  25.53,242.03 0 top
R173  RESISTOR_0603_1K  [0603-RES]  69.22,238.32 180 top
R174  RESISTOR_0603_240  [0603-RES]  51,192.7 90 bottom
SHDN_B  LED_0603_ORANGE  [0603-LED]  52.02,242.16 180 top
SHDN_BTN  CONNECTOR-2_μF_T_V_  [MOLEX_MICROFIT_PTH_VERTICAL_02_DUAL]  74.68,189.45 180 top
SHDN_C  LED_0603_ORANGE  [0603-LED]  56.39,242.16 180 top
SHDN_D  LED_0603_ORANGE  [0603-LED]  61.21,242.16 180 top
SHDN_E  LED_0603_ORANGE  [0603-LED]  65.53,242.16 180 top
SHDN_F  LED_0603_ORANGE  [0603-LED]  69.27,236.62 180 top
STATUS_4.0  LED_0603_RED  [0603-LED]  17.4,226.28 0 top
STATUS_4.1  LED_0603_RED  [0603-LED]  45.8,246.35 180 top
T1  TRANSFORMER_HM2112ZNLT_AIRGAP  [HM2112ZNLT_AIRGAP]  51.37,70.45 270 top
TP6  TEST_POINT  [MICRO_MINIATURE]  35.44,86.59 90 top
TP7  TEST_POINT  [MICRO_MINIATURE]  35.42,76.1 90 top
TP22  TEST_POINT  [5015]  60.96,246.47 0 top
TP23  TEST_POINT  [5015]  65.41,246.47 0 top
TP24  TEST_POINT  [5015]  83.69,240.38 0 top
TP25  TEST_POINT  [5015]  79.6,240.35 0 top
TP26  TEST_POINT  [5015]  73.79,240.38 0 top
TP27  TEST_POINT  [5015]  18.67,209.14 180 top
TP28  TEST_POINT  [5015]  18.92,214.85 0 top
TP29  TEST_POINT  [5015]  18.67,205.45 0 top
TP30  TEST_POINT  [5015]  46.35,242.03 180 top
TP31  TEST_POINT  [5015]  52.07,246.47 0 top
TP32  TEST_POINT  [5015]  56.51,246.47 180 top
TP33  TEST_POINT  [5015]  5.08,233.52 90 top
TP34  TEST_POINT  [5015]  69.34,240.38 0 top
TP_3.3V  TEST_POINT  [MICRO_MINIATURE]  94.24,84.68 90 top
TP_5V  TEST_POINT  [MICRO_MINIATURE]  90.54,84.62 90 top
TP_12V  TEST_POINT  [MICRO_MINIATURE]  86.93,84.66 90 top
TP_AMS_OK  TEST_POINT  [MICRO_MINIATURE]  81.86,84.79 90 top
TP_GND  TEST_POINT  [MICRO_MINIATURE]  97.86,84.85 90 top
TP_IMD_OK  TEST_POINT  [MICRO_MINIATURE]  77.9,84.66 90 top
TP_TSAL_GREEN  TEST_POINT  [MICRO_MINIATURE]  142.72,14.22 90 top
TP_TSAL_RED  TEST_POINT  [MICRO_MINIATURE]  153.14,26.92 90 top
TS+_OUT_TEST  TEST_POINT  [MICRO_MINIATURE]  139.01,67.16 270 top
U1  RELAY_SOLIDSTATE_NO  [DIP-4]  86.88,101.64 180 top
U2  ADG1423  [MSOP-10]  141.57,12.52 0 bottom
U3  LM555  [SOIC-08(NARROW,0.15")]  147.92,11.25 180 bottom
U4  OPAMP_1_CHANNEL_OPA991  [SC-70-5]  134.76,53.37 90 top
U5  LTC6820  [MSOP-16]  109.15,144.17 180 top
U6  ADM8316WBX30  [SOT-23-5]  107.43,168.05 270 top
U7  OPAMP_1_CHANNEL_OPA991  [SC-70-5]  137.6,22.15 180 top
U8  LOGICGATE_AND_DCK3  [SC-70-5]  131.66,36.61 90 top
U9  OPAMP_1_CHANNEL_OPA991  [SC-70-5]  136.38,33.84 90 top
U10  OPAMP_1_CHANNEL_OPA991  [SC-70-5]  134.73,59.26 90 top
U11  LOGICGATE_AND_DCK3  [SC-70-5]  128.23,50.55 90 top
U12  OPAMP_1_CHANNEL_OPA991  [SC-70-5]  136.18,40.34 90 top
U13  OPAMP_1_CHANNEL_OPA991  [SC-70-5]  141.79,32.21 90 top
U14  OPAMP_1_CHANNEL_OPA991  [SC-70-5]  142.07,56.72 90 top
U15  LOGICGATE_AND_DCK3  [SC-70-5]  129.9,56.44 90 top
U16  RELAY_SOLIDSTATE_NO  [DIP-4]  76.22,101.67 180 top
U17  VOLTAGE_REGULATOR_SOT223_3.3V  [SOT223]  145.9,127.66 90 top
U18  OPAMP_1_CHANNEL_OPA991  [SC-70-5]  145.51,7.56 270 top
U19  MAX7404  [SOIC-08(NARROW,0.15")]  144.91,79.78 0 top
U20  OPAMP_1_CHANNEL_OPA991  [SC-70-5]  143.51,73.18 0 top
U21  LOGICGATE_BUFFER  [SC-70-5]  105.13,155.7 180 top
U22  OPAMP_1_CHANNEL_OPA991  [SC-70-5]  123.54,122.37 0 top
U25  TCAN1051HQV-Q1  [SOIC-08(NARROW,0.15")]  150.69,140.84 180 top
U26  MAX7404  [SOIC-08(NARROW,0.15")]  124.04,128.98 0 top
U27  OPAMP_1_CHANNEL_OPA991  [SC-70-5]  114.39,122.37 0 top
U28  MAX7404  [SOIC-08(NARROW,0.15")]  114.9,128.98 0 top
U29  OPAMP_1_CHANNEL_OPA991  [SC-70-5]  134.34,72.62 0 top
U30  MAX7404  [SOIC-08(NARROW,0.15")]  134.72,79.48 0 top
U38  VOLTAGE_REGULATOR_SOT-223_5V  [SOT-223]  12.19,213.96 0 top
U39  ADM8316WBX30  [SOT-23-5]  29.21,225.9 0 top
U40  RELAY_SOLIDSTATE_NO  [DIP-4]  124.06,39.26 0 top
U41  LOGICGATE_BUFFER  [SC-70-5]  25.65,225.9 180 top
U100  MCP2562FD  [SOIC-08(NARROW,0.15")]  19.56,238.47 270 bottom
U101  MCP2562FD  [SOIC-08(NARROW,0.15")]  19.56,258.67 270 bottom
U$1  [GLV]  58.14,99.06 90 top
U$3  [TS]  41.12,88.34 180 top
U$4  [HV_0.50"]  48.13,84.53 90 top
U$5  [GLV]  40.36,55.88 180 top
U$6  [MOUNTING_M3]  164.36,83.49 90 top
U$7  [MOUNTING_M3]  164.36,4.5 90 top
U$8  [MOUNTING_M3]  152.45,182.17 90 top
U$9  [TS]  39.09,60.96 180 top
U$10  [TS]  51.79,97.79 270 top
U$11  [MOUNTING_M3]  150.97,174.17 90 top
U$12  [MOUNTING_M3]  150.97,117.42 90 top
U$13  [MOUNTING_M3]  150.97,44.17 90 top
U$14  [MOUNTING_M3]  99.47,182.17 90 top
U$15  [LOGO_HYTECH_EXTRA_LARGE]  120.32,36.73 90 top
U$16  [LOGO_GT_0.50"]  154.91,96.77 90 top
U$17  [MOUNTING_M3]  100.97,174.17 90 top
U$18  [MOUNTING_M3]  100.97,117.42 90 top
U$19  [MOUNTING_M3]  100.97,44.17 90 top
U$20  [MOUNTING_M3]  99.47,4.5 90 top
U$21  [MOUNTING_M3]  37.62,51 90 top
U$22  [MOUNTING_M3]  37.62,97.5 90 top
U$40  [MOUNTING_M3]  83.36,265.7 0 top
U$42  [MOUNTING_M3]  3,187.88 0 top
U$49  [MOUNTING_M3]  83.36,187.88 0 top
U$50  [MOUNTING_M3]  3,265.7 0 top
U$51  [LOGO_HYTECH_MEDIUM]  8.13,205.15 90 top
U$78  RELAY_SOLIDSTATE_NO  [DIP-4]  35.89,219.02 270 top
U$79  [LOGO_HYTECH_LARGE]  51.43,214.73 0 bottom
U$80  [LOGO_GT_LARGE]  69.77,241.24 0 bottom
U$100  RELAY_SOLIDSTATE_NO  [DIP-4]  42.32,202.36 0 bottom
WATCHDOG_OK  TEST_POINT  [MICRO_MINIATURE]  117.35,173.33 90 top
XB1  BATTERY_HOLDER_KEYSTONE_498  [498]  77.22,252.44 270 top
XF1  FUSE_HOLDER_MINIBLADEPTH  [3568]  138.15,113.03 180 top
XF3  FUSE_HOLDER_MINIBLADEPTH  [3568]  26.42,205.71 90 top
XF4  FUSE_HOLDER_MINIBLADEPTH  [3568]  35.31,205.71 90 top

## Library data of the parts
3.3V AMS_OK = HyTechDevices - Copy; COLOR: Green; DKPN: 754-1790-1-ND; MANUFACTURER: Kingbright; MOPN: 604-APT1608ZGCK; MPN: APT1608ZGCK
4.1_ONLY CAN_TERM = HyTechDevices_Jumper; DKPN: WM23656-ND; MANUFACTURER: Molex; MOPN: 538-90120-1082; MPN: 90120-1082
5V = HyTechDevices - Copy; COLOR: Blue; DKPN: 754-1789-1-ND; MANUFACTURER: Kingbright; MOPN: 604-APT1608VBC/D; MPN: APT1608VBC/D
5V_PWR = HyTechDevices; COLOR: Blue; DKPN: 754-1789-1-ND; MANUFACTURER: Kingbright; MOPN: 604-APT1608VBC/D; MPN: APT1608VBC/D
12V = HyTechDevices - Copy; COLOR: Red; DKPN: 754-1786-1-ND; MANUFACTURER: Kingbright; MOPN: 604-APT1608SECKJ3PRV; MPN: APT1608SECK/J3-PRV
A1 A3 = HyTechDevices; TEENSY: 4.0
A2 = HyTechDevices - Copy; DKPN: 811-2196-5-ND; MANUFACTURER: Murata Power Solutions Inc.; MOPN: 580-OKI78SR5/1.5W36C; MPN: OKI-78SR-5/1.5-W36-C
A4 = HyTechDevices; TEENSY: 4.1
AUX_CAN = HyTechDevices - Copy; MANUFACTURER: Molex; MPN: 430450414
BMS_OK CCU_OK D2 D10 = HyTechDevices; COLOR: Green; DKPN: 754-1790-1-ND; MANUFACTURER: Kingbright; MOPN: 604-APT1608ZGCK; MPN: APT1608ZGCK
BSPD_CURRENT CURRENT_REF CURRENT_SENSE PACK+_OUT_TEST TP6 TP7 TP_AMS_OK TP_IMD_OK TS+_OUT_TEST WATCHDOG_OK = HyTechDevices - Copy; DKPN: 36-5015CT-ND; MANUFACTURER: Keystone Electronics; MOPN: 534-5015; MPN: 5015
C1 C2 C82 C83 = HyTechDevices; CAPACITANCE: 10µF; DKPN: 490-7202-1-ND; MANUFACTURER: Murata Electronics; MOPN: 81-GRM188R61E106MA3D; MPN: GRM188R61E106MA73D; TOLERANCE: 20%; VOLTAGE: 25V
C3 = HyTechDevices; CAPACITANCE: 1µF; DKPN: 1276-1184-1-ND; MANUFACTURER: Samsung Electro-Mechanics; MOPN: 187-CL10B105KA8NNNC; MPN: CL10B105KA8NNNC; TOLERANCE: 10%; VOLTAGE: 25V
C4 C33 = HyTechDevices - Copy; CAPACITANCE: 10nF; DKPN: 311-4054-1-ND; MANUFACTURER: Yageo; MOPN: 603-CC603KRX7R6BB103; MPN: CC0603KRX7R6BB103; TOLERANCE: 10%; VOLTAGE: 10V
C5 C10 = HyTechDevices - Copy; CAPACITANCE: 4.7µF; DKPN: 1276-1044-1-ND; MANUFACTURER: Samsung Electro-Mechanics; MOPN: 187-CL10A475KP8NNNC; MPN: CL10A475KP8NNNC; TOLERANCE: 10%; VOLTAGE: 10V
C6 = HyTechDevices - Copy; CAPACITANCE: 1µF; DKPN: 1276-1184-1-ND; MANUFACTURER: Samsung Electro-Mechanics; MOPN: 187-CL10B105KA8NNNC; MPN: CL10B105KA8NNNC; TOLERANCE: 10%; VOLTAGE: 25V
C7 = HyTechDevices - Copy; CAPACITANCE: 0.1µF; DKPN: 1276-1006-1-ND; MANUFACTURER: Samsung Electro-Mechanics; MOPN: 187-CL10B104KA8NNNC; MPN: CL10B104KA8NNNC; TOLERANCE: 10%; VOLTAGE: 25V
C8 C28 C37 C46 C50 = HyTechDevices; CAPACITANCE: 0.1µF; DKPN: 1276-1006-1-ND; MANUFACTURER: Samsung Electro-Mechanics; MOPN: 187-CL10B104KA8NNNC; MPN: CL10B104KA8NNNC; TOLERANCE: 10%; VOLTAGE: 25V
C9 = HyTechDevices - Copy; CAPACITANCE: 1µF; DKPN: 311-1796-1-ND; MANUFACTURER: Yageo; MOPN: 603-CC603KRX7R6BB105; MPN: CC0603KRX7R6BB105; TOLERANCE: 10%; VOLTAGE: 10V
C11-C14 C16 C20 C22-C27 C31 C86-C89 C100-C103 = HyTechDevices; CAPACITANCE: 0.1µF; DKPN: 720-1688-1-ND; MANUFACTURER: Vishay Vitramon; MOPN: 77-VJ0603Y104JXQPBC; MPN: VJ0603Y104JXQPW1BC; TOLERANCE: 5%; VOLTAGE: 10V
C15 = HyTechDevices; CAPACITANCE: 10nF; DKPN: 311-4054-1-ND; MANUFACTURER: Yageo; MOPN: 603-CC603KRX7R6BB103; MPN: CC0603KRX7R6BB103; TOLERANCE: 10%; VOLTAGE: 10V
C29 C30 C35 C36 C39 C40 C47 C48 C51 C52 = HyTechDevices - Copy; CAPACITANCE: 0.1µF; DKPN: 720-1688-1-ND; MANUFACTURER: Vishay Vitramon; MOPN: 77-VJ0603Y104JXQPBC; MPN: VJ0603Y104JXQPW1BC; TOLERANCE: 5%; VOLTAGE: 10V
C32 C85 = HyTechDevices; CAPACITANCE: 1µF; DKPN: 311-1796-1-ND; MANUFACTURER: Yageo; MOPN: 603-CC603KRX7R6BB105; MPN: CC0603KRX7R6BB105; TOLERANCE: 10%; VOLTAGE: 10V
C43 C45 C49 C53 = HyTechDevices - Copy; CAPACITANCE: 680pF; DKPN: 732-7757-1-ND; MANUFACTURER: Würth Elektronik; MOPN: 710-885012006013; MPN: 885012006013; TOLERANCE: 5%; VOLTAGE: 10V
C84 = HyTechDevices; CAPACITANCE: 4.7nF; DKPN: 732-7931-1-ND; MANUFACTURER: Würth Elektronik; MOPN: 710-885012206012; MPN: 885012206012; TOLERANCE: 10%; VOLTAGE: 10V
CHG_CAN = HyTechDevices - Copy; MANUFACTURER: MOLEX; MPN: 430450614
D1 D5 D7-D9 D12 D15 D16 D31 D101 D102 = HyTechDevices; DKPN: GSOT15-E3-08CT-ND; MANUFACTURER: Vishay General Semiconductor - Diodes Division; MOPN: 78-GSOT15-E3-08; MPN: GSOT15-E3-08; VOLTAGE: 15V
D3 D6 D14 D32 STATUS_4.0 STATUS_4.1 = HyTechDevices; COLOR: Red; DKPN: 754-1786-1-ND; MANUFACTURER: Kingbright; MOPN: 604-APT1608SECKJ3PRV; MPN: APT1608SECK/J3-PRV
D4 D13 = HyTechDevices - Copy; DKPN: GSOT08-E3-08-ND; MANUFACTURER: Vishay General Semiconductor - Diodes Division; MOPN: 78-GSOT08-E3-08; MPN: GSOT08-E3-08; VOLTAGE: 8V
D11 = HyTechDevices - Copy; COLOR: Yellow; DKPN: 754-1788-1-ND; MANUFACTURER: Kingbright; MOPN: 604-APT1608SYCK/J3-PRV; MPN: APT1608SYCK/J3-PRV
D33-D35 D103-D105 = HyTechDevices; CURRENT: 0.8A; DKPN: CUS08F30H3FTR-ND; MANUFACTURER: Toshiba Semiconductor and Storage; MOPN: 757-CUS08F30H3F; MPN: CUS08F30; VOLTAGE: 30V
D100 = HyTechDevices; DKPN: 296-25281-1-ND; MANUFACTURER: Texas Instruments; MOPN: 595-TPD2E007DCKR; MPN: TPD2E007DCKR
E_SELECT F_SELECT = HyTechDevices_Jumper; DKPN: 13-RC0603FR-130RLTR-ND; MANUFACTURER: YAGEO; MOPN: 603-RC0603FR-130RL; MPN: RC0603FR-130RL
IMD_OK = HyTechDevices - Copy; COLOR: Orange; DKPN: 754-1120-1-ND; MANUFACTURER: Kingbright; MOPN: 604-APT1608SECK; MPN: APT1608SECK
J1 = HyTechDevices; DKPN: WM1832CT-ND; MANUFACTURER: Molex; MOPN: 538-43045-0411; MPN: 0430450411
J2 MAIN_CONNECTOR = HyTechDevices - Copy; MANUFACTURER: MOLEX; MPN: 430450814
J3 = HyTechDevices; DKPN: S7107-ND; MANUFACTURER: Sullins Connector Solutions; MPN: PPPC042LFBN-RC
J4 = HyTechDevices - Copy; MANUFACTURER: MOLEX; MPN: 436500217
J5 = HyTechDevices - Copy; MANUFACTURER: MOLEX; MPN: 430451214
J6 = HyTechDevices - Copy; MANUFACTURER: MOLEX; MPN: 430451414
K1-K3 = HyTechDevices; DKPN: PB2021-ND; MANUFACTURER: TE Connectivity; MOPN: 655-6-1393243-2; MPN: RT424009
LATCH = HyTechDevices; COLOR: White; DKPN: SM0603UWC-ND; MANUFACTURER: Bivar Inc.; MOPN: 749-SM0603UWC; MPN: SM0603UWC
LATCH_BUTTON = HyTechDevices; DKPN: SW415-ND; MANUFACTURER: Omron; MOPN: 653-B3S-1000; MPN: B3S-1000
OKHS = HyTechDevices; COLOR: Yellow; DKPN: 754-1788-1-ND; MANUFACTURER: Kingbright; MOPN: 604-APT1608SYCK/J3-PRV; MPN: APT1608SYCK/J3-PRV
POWER SHDN_BTN = HyTechDevices; DKPN: WM10657-ND; MANUFACTURER: Molex; MOPN: 538-43045-0227; MPN: 0430450227
Q1-Q4 = HyTechDevices; DKPN: 1727-8588-1-ND; MANUFACTURER: Nexperia USA Inc.; MOPN: 771-PMV15ENEAR; MPN: PMV15ENEAR
R1-R3 R7 R8 R31 R71 R135 R143-R147 R158-R161 R164 R168 R173 = HyTechDevices; DKPN: 311-1.00KHRCT-ND; MANUFACTURER: Yageo; MOPN: 603-RC0603FR-071KL; MPN: RC0603FR-071KL; POWER: 0.1W; RESISTANCE: 1k; TOLERANCE: 1%; VOLTAGE_CONTINUOUS: 10.00V; VOLTAGE_MAX: 75V
R4 R18 R22 R32 R40 = HyTechDevices; RESISTANCE: DNP
R5 R17 = HyTechDevices; DKPN: P4.12KDBCT-ND; MANUFACTURER: Panasonic Electronic Components; MOPN: 667-ERA-3AEB4121V; MPN: ERA-3AEB4121V; POWER: 0.1W; RESISTANCE: 4.12k; TOLERANCE: 0.1%; VOLTAGE_CONTINUOUS: 20.30V; VOLTAGE_MAX: 75V
R6 = HyTechDevices; DKPN: 311-43.0KHRCT-ND; MANUFACTURER: Yageo; MOPN: 603-RC0603FR-0743KL; MPN: RC0603FR-0743KL; POWER: 0.1W; RESISTANCE: 43k; TOLERANCE: 1%; VOLTAGE_CONTINUOUS: 65.57V; VOLTAGE_MAX: 75V
R9 R55 R58 R60 R64 R66 R68 R77-R82 R84-R87 = HyTechDevices - Copy; DKPN: 311-10.0KHRCT-ND; MANUFACTURER: Yageo; MOPN: 603-RC0603FR-0710KL; MPN: RC0603FR-0710KL; POWER: 0.1W; RESISTANCE: 10k; TOLERANCE: 1%; VOLTAGE_CONTINUOUS: 31.62V; VOLTAGE_MAX: 75V
R10 R47 R50 = HyTechDevices - Copy; DKPN: 311-1.00KHRCT-ND; MANUFACTURER: Yageo; MOPN: 603-RC0603FR-071KL; MPN: RC0603FR-071KL; POWER: 0.1W; RESISTANCE: 1k; TOLERANCE: 1%; VOLTAGE_CONTINUOUS: 10.00V; VOLTAGE_MAX: 75V
R11 = HyTechDevices - Copy; DKPN: 311-2465-1-ND; MANUFACTURER: Yageo; MOPN: 603-RT0603DRE071K4L; MPN: RT0603DRE071K4L; POWER: 0.1W; RESISTANCE: 1.4K; TOLERANCE: 0.5%; VOLTAGE_CONTINUOUS: 75V; VOLTAGE_MAX: 75V
R12 R48 R54 R59 R61 R62 R89 R91 R136-R138 R165 R166 R169 = HyTechDevices; DKPN: 311-10.0KHRCT-ND; MANUFACTURER: Yageo; MOPN: 603-RC0603FR-0710KL; MPN: RC0603FR-0710KL; POWER: 0.1W; RESISTANCE: 10k; TOLERANCE: 1%; VOLTAGE_CONTINUOUS: 31.62V; VOLTAGE_MAX: 75V
R13 = HyTechDevices - Copy; DKPN: YAG2294CT-ND; MANUFACTURER: Yageo; MOPN: 603-RC0603JR-10100KL; MPN: RC0603JR-10100KL; POWER: 0.1W; RESISTANCE: 100k; TOLERANCE: 5%; VOLTAGE_CONTINUOUS: 75V; VOLTAGE_MAX: 75V
R14 R30 R39 R44 R51 = HyTechDevices; DKPN: 311-33.0KHRTR-ND; MANUFACTURER: YAGEO; MOPN: 603-RC0603FR-0733KL; MPN: RC0603FR-0733KL; POWER: 0.1W; RESISTANCE: 33k; TOLERANCE: 1%; VOLTAGE_CONTINUOUS: 57.44V; VOLTAGE_MAX: 75V
R15 R43 R45 R63 R65 R67 R69 = HyTechDevices - Copy; DKPN: 311-12.0KHRCT-ND; MANUFACTURER: Yageo; MOPN: 603-RC0603FR-0712KL; MPN: RC0603FR-0712KL; POWER: 0.1W; RESISTANCE: 12k; TOLERANCE: 1%; VOLTAGE_CONTINUOUS: 34.64V; VOLTAGE_MAX: 75V
R16 R19 = HyTechDevices; DKPN: P10.2KDBCT-ND; MANUFACTURER: Panasonic Electronic Components; MOPN: 667-ERA-3AEB1022V; MPN: ERA-3AEB1022V; POWER: 0.1W; RESISTANCE: 10.2k; TOLERANCE: 0.1%; VOLTAGE_CONTINUOUS: 31.94V; VOLTAGE_MAX: 75V
R20 R25-R29 R33 = HyTechDevices; DKPN: P11.5KDBCT-ND; MANUFACTURER: Panasonic Electronic Components; MOPN: 667-ERA-3AEB1152V; MPN: ERA-3AEB1152V; POWER: 0.1W; RESISTANCE: 11.5k; TOLERANCE: 0.1%; VOLTAGE_CONTINUOUS: 33.91V; VOLTAGE_MAX: 75V
R21 R49 R88 R90 = HyTechDevices; DKPN: 311-10.0HRCT-ND; MANUFACTURER: Yageo; MOPN: 603-RC0603FR-0710RL; MPN: RC0603FR-0710RL; POWER: 0.1W; RESISTANCE: 10; TOLERANCE: 1%; VOLTAGE_CONTINUOUS: 1V; VOLTAGE_MAX: 75V
R23 = HyTechDevices; DKPN: 311-18.7KHRCT-ND; MANUFACTURER: Yageo; MOPN: 603-RC0603FR-0718K7L; MPN: RC0603FR-0718K7L; POWER: 0.1W; RESISTANCE: 18.7k; TOLERANCE: 1%; VOLTAGE_CONTINUOUS: 43.24V; VOLTAGE_MAX: 75V
R24 = HyTechDevices; DKPN: P84.5KDBCT-ND; MANUFACTURER: Panasonic Electronic Components; MOPN: 667-ERA-3AEB8452V; MPN: ERA-3AEB8452V; POWER: 0.1W; RESISTANCE: 84.5k; TOLERANCE: 0.1%; VOLTAGE_CONTINUOUS: 75V; VOLTAGE_MAX: 75V
R34 = HyTechDevices - Copy; DKPN: P2.0KBDCT-ND; MANUFACTURER: Panasonic Electronic Components; MOPN: 667-ERA-3ARB202V; MPN: ERA-3ARB202V; POWER: 0.1W; RESISTANCE: 2k; TOLERANCE: 0.1%; VOLTAGE_CONTINUOUS: 14.14V; VOLTAGE_MAX: 75V
R35-R38 = HyTechDevices; DKPN: P10.5KDBCT-ND; MANUFACTURER: Panasonic Electronic Components; MOPN: 677-ERA-3AEB1052V; MPN: ERA-3AEB1052V; POWER: 0.1W; RESISTANCE: 10.5k; TOLERANCE: 0.1%; VOLTAGE_CONTINUOUS: 32.40V; VOLTAGE_MAX: 75V
R41 = HyTechDevices; DKPN: P215KDBCT-ND; MANUFACTURER: Panasonic Electronic Components; MOPN: 667-ERA-3AEB2153V; MPN: ERA-3AEB2153V; POWER: 0.1W; RESISTANCE: 215k; TOLERANCE: 0.1%; VOLTAGE_CONTINUOUS: 75V; VOLTAGE_MAX: 75V
R42 = HyTechDevices; DKPN: P11.3KDBCT-ND; MANUFACTURER: Panasonic Electronic Components; MOPN: 667-ERA-3AEB1132V; MPN: ERA-3AEB1132V; POWER: 0.1W; RESISTANCE: 11.3k; TOLERANCE: 0.1%; VOLTAGE_CONTINUOUS: 33.62V; VOLTAGE_MAX: 75V
R46 = HyTechDevices - Copy; DKPN: 13-RC0603DR-072K2LCT-ND; MANUFACTURER: Yageo; MOPN: 603-RC0603DR-072K2L; MPN: RC0603DR-072K2L; POWER: 0.1W; RESISTANCE: 2.2k; TOLERANCE: 0.5%; VOLTAGE_CONTINUOUS: 75V; VOLTAGE_MAX: 75V
R52 = HyTechDevices; DKPN: P15KBDCT-ND; MANUFACTURER: Panasonic Electronic Components; MOPN: 667-ERA-3ARB153V; MPN: ERA-3ARB153V; POWER: 0.1W; RESISTANCE: 15k; TOLERANCE: 0.1%; VOLTAGE_CONTINUOUS: 38.73V; VOLTAGE_MAX: 75V
R53 = HyTechDevices; DKPN: 311-100HRCT-ND; MANUFACTURER: Yageo; MOPN: 603-RC0603FR-07100RL; MPN: RC0603FR-07100RL; POWER: 0.1W; RESISTANCE: 100; TOLERANCE: 1%; VOLTAGE_CONTINUOUS: 3.16V; VOLTAGE_MAX: 75V
R56 R70 R72-R74 R92 = HyTechDevices; DKPN: P2.0KBDCT-ND; MANUFACTURER: Panasonic Electronic Components; MOPN: 667-ERA-3ARB202V; MPN: ERA-3ARB202V; POWER: 0.1W; RESISTANCE: 2k; TOLERANCE: 0.1%; VOLTAGE_CONTINUOUS: 14.14V; VOLTAGE_MAX: 75V
R57 = HyTechDevices; DKPN: P470BYCT-ND; MANUFACTURER: Panasonic Electronic Components; MOPN: 667-ERJ-PA3F4700V; MPN: ERJ-PA3F4700V; POWER: 0.25W; RESISTANCE: 470; TOLERANCE: 1%; VOLTAGE_CONTINUOUS: 10.84V; VOLTAGE_MAX: 150V
R75 R76 = HyTechDevices - Copy; DKPN: P470BYCT-ND; MANUFACTURER: Panasonic Electronic Components; MOPN: 667-ERJ-PA3F4700V; MPN: ERJ-PA3F4700V; POWER: 0.25W; RESISTANCE: 470; TOLERANCE: 1%; VOLTAGE_CONTINUOUS: 10.84V; VOLTAGE_MAX: 150V
R134 R141 R142 = HyTechDevices; DKPN: 311-22.0HRCT-ND; MANUFACTURER: Yageo; MOPN: 603-RC0603FR-0722RL; MPN: RC0603FR-0722RL; POWER: 0.1W; RESISTANCE: 22; TOLERANCE: 1%; VOLTAGE_CONTINUOUS: 1.48V; VOLTAGE_MAX: 75V
R139 R140 = HyTechDevices; DKPN: 311-60.4HRCT-ND; MANUFACTURER: Yageo; MOPN: 603-RC0603FR-0760R4L; MPN: RC0603FR-0760R4L; POWER: 0.1W; RESISTANCE: 60.4; TOLERANCE: 1%; VOLTAGE_CONTINUOUS: 2.48V; VOLTAGE_MAX: 75V
R148 R150 R152 R154 R156 R162 R171 = HyTechDevices; DKPN: RHM33KAYTR-ND; MANUFACTURER: Rohm Semiconductor; MOPN: 755-KTR03EZPF3302; MPN: KTR03EZPF3302; POWER: 0.1W; RESISTANCE: 33k; TOLERANCE: 1%; VOLTAGE_CONTINUOUS: 57.4V; VOLTAGE_MAX: 350V
R149 R151 R153 R155 R157 R163 R172 = HyTechDevices; DKPN: 311-12.0KHRCT-ND; MANUFACTURER: Yageo; MOPN: 603-RC0603FR-0712KL; MPN: RC0603FR-0712KL; POWER: 0.1W; RESISTANCE: 12k; TOLERANCE: 1%; VOLTAGE_CONTINUOUS: 34.64V; VOLTAGE_MAX: 75V
R167 = HyTechDevices; DKPN: 311-100KHRTR-ND; MANUFACTURER: Yageo; MOPN: 603-RC0603FR-07100KL; MPN: RC0603FR-07100KL; POWER: 0.1W; RESISTANCE: 100k; TOLERANCE: 1%; VOLTAGE_CONTINUOUS: 75V; VOLTAGE_MAX: 75V
R170 = HyTechDevices; DKPN: 311-240HRCT-ND; MANUFACTURER: Yageo; MOPN: 603-RC0603FR-07240RL; MPN: RC0603FR-07240RL; POWER: 0.1W; RESISTANCE: 240; TOLERANCE: 1%; VOLTAGE_CONTINUOUS: 4.90V; VOLTAGE_MAX: 75V
R174 = HyTechDevices_Jumper; DKPN: 311-240HRCT-ND; MANUFACTURER: Yageo; MOPN: 603-RC0603FR-07240RL; MPN: RC0603FR-07240RL; POWER: 0.1W; RESISTANCE: 240; TOLERANCE: 1%; VOLTAGE_CONTINUOUS: 4.90V; VOLTAGE_MAX: 75V
SHDN_B SHDN_C SHDN_D SHDN_E SHDN_F = HyTechDevices; COLOR: Orange; DKPN: 754-1120-1-ND; MANUFACTURER: Kingbright; MOPN: 604-APT1608SECK; MPN: APT1608SECK
T1 = HyTechDevices; DKPN: 1840-1036-1-ND; MANUFACTURER: Pulse Electronics; MOPN: 673-HM2112ZNLT; MPN: HM2112ZNLT
TP22 = HyTechDevices; DKPN: 36-5015CT-ND; MANUFACTURER: Keystone Electronics; MOPN: 534-5015; MPN: 5015; SIGNAL: SHDN_D
TP23 = HyTechDevices; DKPN: 36-5015CT-ND; MANUFACTURER: Keystone Electronics; MOPN: 534-5015; MPN: 5015; SIGNAL: SHDN_E
TP24 = HyTechDevices; DKPN: 36-5015CT-ND; MANUFACTURER: Keystone Electronics; MOPN: 534-5015; MPN: 5015; SIGNAL: CCU_OK
TP25 = HyTechDevices; DKPN: 36-5015CT-ND; MANUFACTURER: Keystone Electronics; MOPN: 534-5015; MPN: 5015; SIGNAL: IMD_OK
TP26 = HyTechDevices; DKPN: 36-5015CT-ND; MANUFACTURER: Keystone Electronics; MOPN: 534-5015; MPN: 5015; SIGNAL: BMS_OK
TP27 = HyTechDevices; DKPN: 36-5015CT-ND; MANUFACTURER: Keystone Electronics; MOPN: 534-5015; MPN: 5015; SIGNAL: GND
TP28 = HyTechDevices; DKPN: 36-5015CT-ND; MANUFACTURER: Keystone Electronics; MOPN: 534-5015; MPN: 5015; SIGNAL: +5V
TP29 = HyTechDevices; DKPN: 36-5015CT-ND; MANUFACTURER: Keystone Electronics; MOPN: 534-5015; MPN: 5015; SIGNAL: +12V
TP30 = HyTechDevices; DKPN: 36-5015CT-ND; MANUFACTURER: Keystone Electronics; MOPN: 534-5015; MPN: 5015; SIGNAL: SHDN_A
TP31 = HyTechDevices; DKPN: 36-5015CT-ND; MANUFACTURER: Keystone Electronics; MOPN: 534-5015; MPN: 5015; SIGNAL: SHDN_B
TP32 = HyTechDevices; DKPN: 36-5015CT-ND; MANUFACTURER: Keystone Electronics; MOPN: 534-5015; MPN: 5015; SIGNAL: SHDN_C
TP33 = HyTechDevices; DKPN: 36-5015CT-ND; MANUFACTURER: Keystone Electronics; MOPN: 534-5015; MPN: 5015; SIGNAL: +3V3
TP34 = HyTechDevices; DKPN: 36-5015CT-ND; MANUFACTURER: Keystone Electronics; MOPN: 534-5015; MPN: 5015; SIGNAL: SHDN_F
TP_3.3V = HyTechDevices - Copy; DKPN: 36-5015CT-ND; MANUFACTURER: Keystone Electronics; MOPN: 534-5015; MPN: 5015; SIGNAL: +3V3
TP_5V = HyTechDevices - Copy; DKPN: 36-5015CT-ND; MANUFACTURER: Keystone Electronics; MOPN: 534-5015; MPN: 5015; SIGNAL: +5V
TP_12V = HyTechDevices - Copy; DKPN: 36-5015CT-ND; MANUFACTURER: Keystone Electronics; MOPN: 534-5015; MPN: 5015; SIGNAL: +12V
TP_GND = HyTechDevices - Copy; DKPN: 36-5015CT-ND; MANUFACTURER: Keystone Electronics; MOPN: 534-5015; MPN: 5015; SIGNAL: GND
TP_TSAL_GREEN = HyTechDevices - Copy; DKPN: 36-5015CT-ND; MANUFACTURER: Keystone Electronics; MOPN: 534-5015; MPN: 5015; SIGNAL: N$18
TP_TSAL_RED = HyTechDevices - Copy; DKPN: 36-5015CT-ND; MANUFACTURER: Keystone Electronics; MOPN: 534-5015; MPN: 5015; SIGNAL: N$19
U1 U16 U40 = HyTechDevices; MPN: AQY214EHA
U2 = HyTechDevices; DKPN: ADG1423BRMZ-REEL7CT-ND; MANUFACTURER: Analog Devices Inc.; MOPN: 584-ADG1423BRMZ; MPN: ADG1423BRMZ
U3 = HyTechDevices; DKPN: LM555CMX/NOPBCT-ND; MANUFACTURER: Texas Instruments; MOPN: 926-LM555CMX/NOPB; MPN: LM555CMX/NOPB
U4 U7 U9 U10 U12-U14 U18 U20 U22 U27 U29 = HyTechDevices; DKPN: 296-OPA991IDCKRCT-ND; MANUFACTURER: Texas Instruments; MOPN: 595-OPA991IDCKR; MPN: OPA991IDCKR
U5 = HyTechDevices - Copy; MANUFACTURER: Analog Devices; MPN: LTC6820IMS#PBF
U6 U39 = HyTechDevices; DKPN: ADM8316WBX30ARJZR7TR-ND; MANUFACTURER: Analog Devices Inc.; MOPN: 584-M8316WBX30ARJZR7; MPN: ADM8316WBX30ARJZR7
U8 U11 U15 = HyTechDevices; DKPN: 296-SN74LVC1G08DCK3TR-ND; MANUFACTURER: Texas Instruments; MOPN: 595-SN74LVC1G08DCK3; MPN: SN74LVC1G08DCK3
U17 = HyTechDevices - Copy; DKPN: 497-17239-1-ND; MANUFACTURER: STMicroelectronics; MOPN: 511-LDL1117S33R; MPN: LDL1117S33R
U19 U26 U28 U30 = HyTechDevices; DKPN: MAX7404CSA+-ND; MANUFACTURER: Maxim Integrated; MOPN: 700-MAX7404CSA; MPN: MAX7404CSA+
U21 U41 = HyTechDevices; DKPN: 296-26604-2-ND; MANUFACTURER: Texas Instruments; MOPN: 595-SN74LVC1G34DCKT; MPN: SN74LVC1G34DCKT
U25 = HyTechDevices; DKPN: 296-49935-1-ND; MANUFACTURER: Texas Instruments; MOPN: 595-TCAN1051HGVDQ1; MPN: TCAN1051HGVDRQ1
U38 = HyTechDevices; DKPN: 497-17240-1-ND; MANUFACTURER: STMicroelectronics; MOPN: 511-LDL1117S50R; MPN: LDL1117S50R
U100 U101 = HyTechDevices; ALT_DKPN: MCP2562-E/SN-ND; ALT_MANUFACTURER: Microchip Technology; ALT_MOPN: 579-MCP2562-E/SN; ALT_MPN: MCP2562-E/SN; DKPN: MCP2562FD-E/SN-ND; MANUFACTURER: Microchip Technology; MOPN: 579-MCP2562FD-E/SN; MPN: MCP2562FD-E/SN
U$1 U$3-U$5 U$9 U$10 U$16 = HyTechAesthetics
U$6-U$8 U$11-U$15 U$17-U$22 U$40 U$42 U$49-U$51 U$79 U$80 = HyTechManufacturing
U$78 U$100 = HyTechDevices; DKPN: 255-1436-5-ND; MANUFACTURER: AQY214EHA; MOPN: 769-AQY214EHA; MPN: AQY214EHA
XB1 = HyTechDevices; BATTERY_TYPE: 1/3N; DKPN: 36-498-ND; MANUFACTURER: Keystone Electronics; MOPN: 534-498; MPN: 498
XF1 XF3 XF4 = HyTechDevices; DKPN: 36-3568-ND; MANUFACTURER: Keystone; MOPN: 534-3568; MPN: 3568